# Altium PCB PCB1.PcbDoc
Units mm, origin at the board's own origin, x right, y up, seen from the top; angles counter-clockwise.
Board outline 100 x 61 mm, 4 copper layers (Top Layer, Mid Layer 1, Mid Layer 2, Bottom Layer), stack 0.97 mm thick; 101 components, 153 nets, 513 pads, 241 vias.
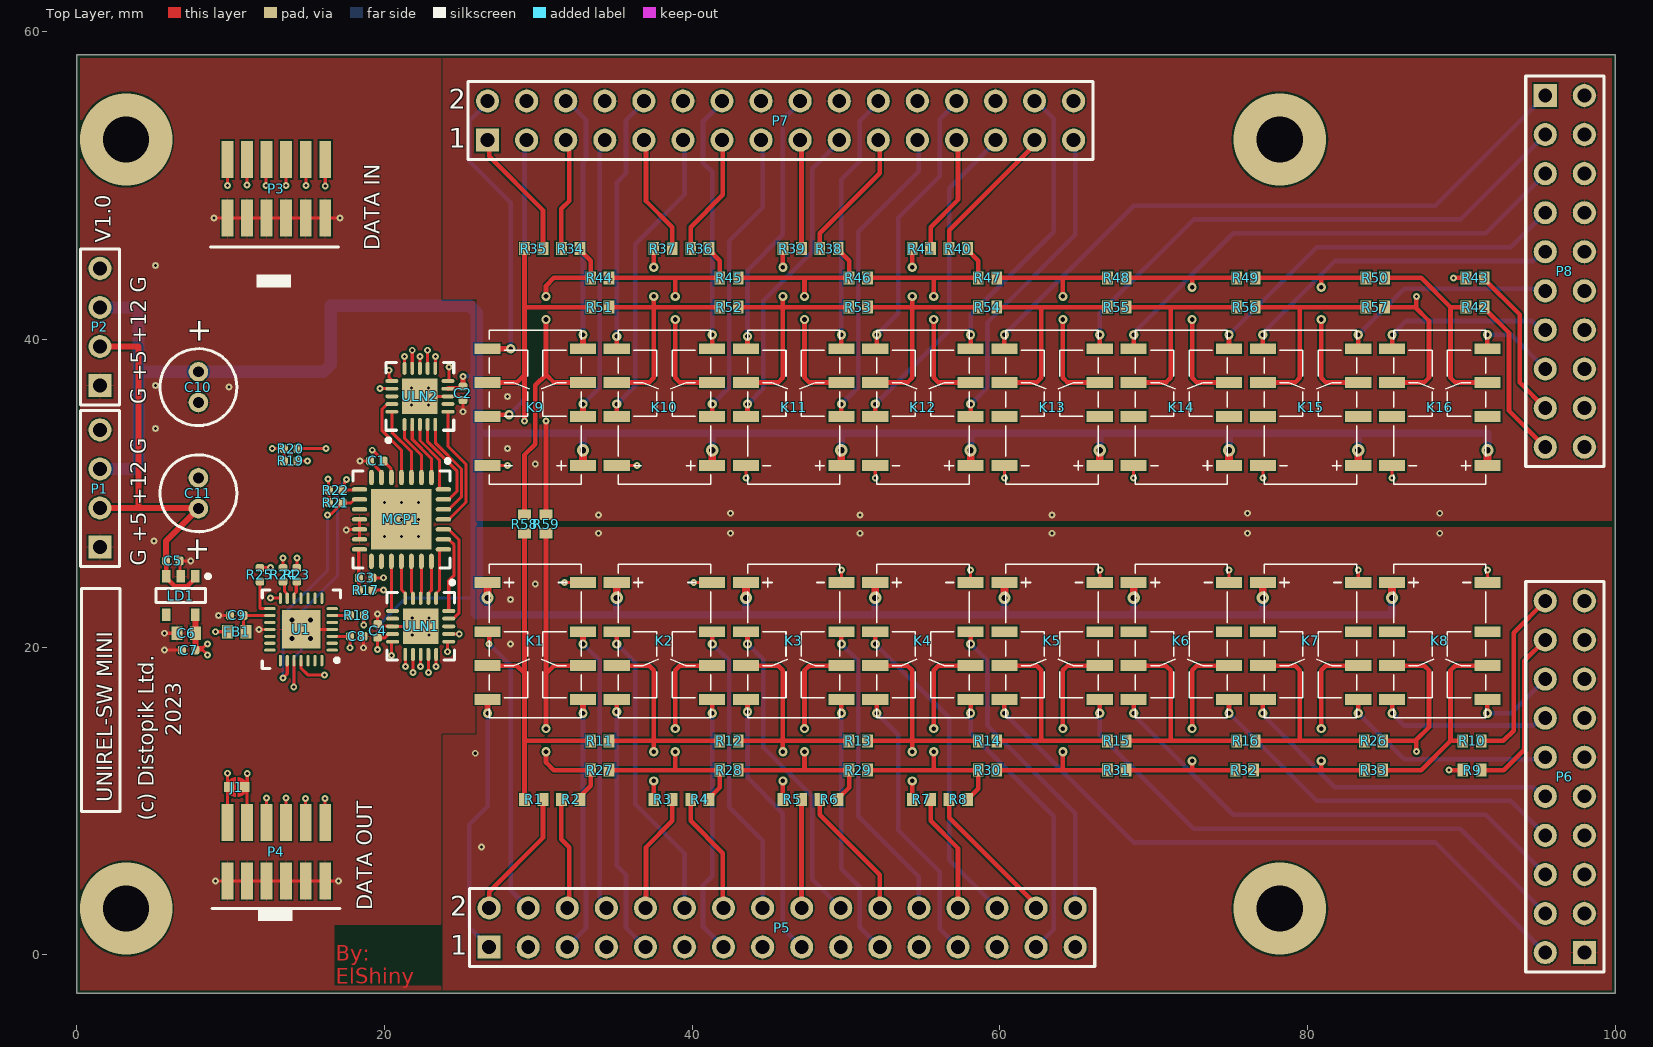
[diagram p0: Top Layer view]
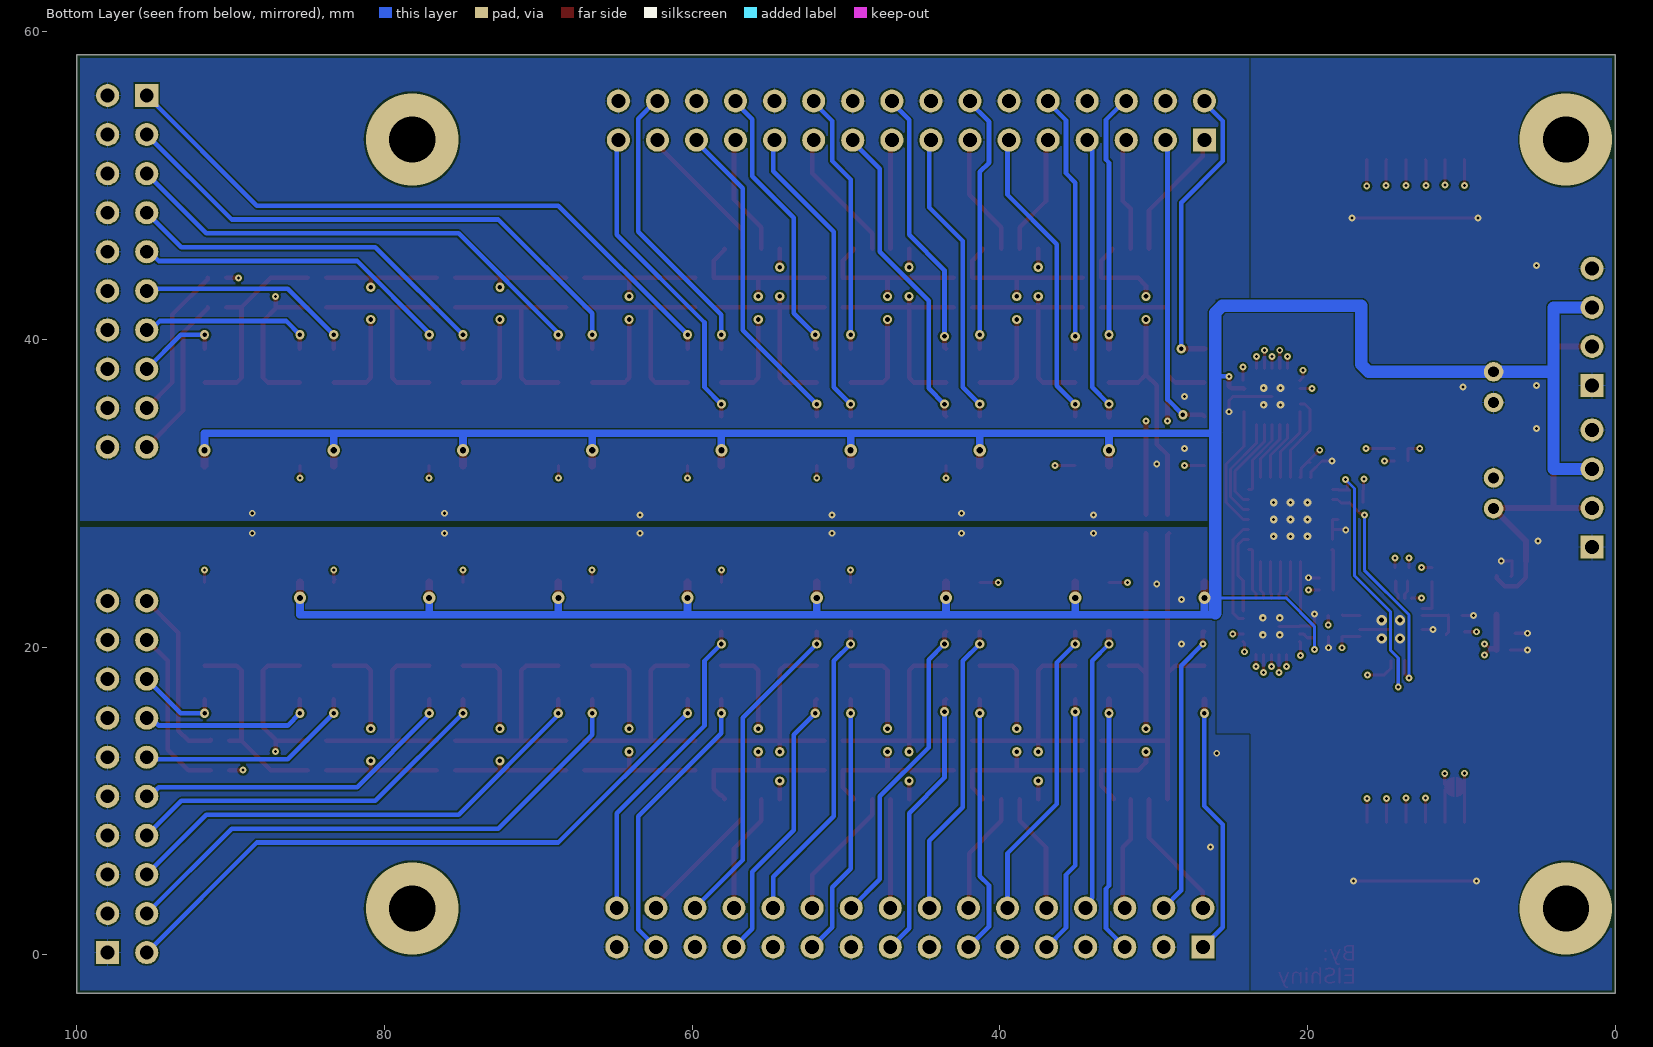
[diagram p1: Bottom Layer view, seen from below]
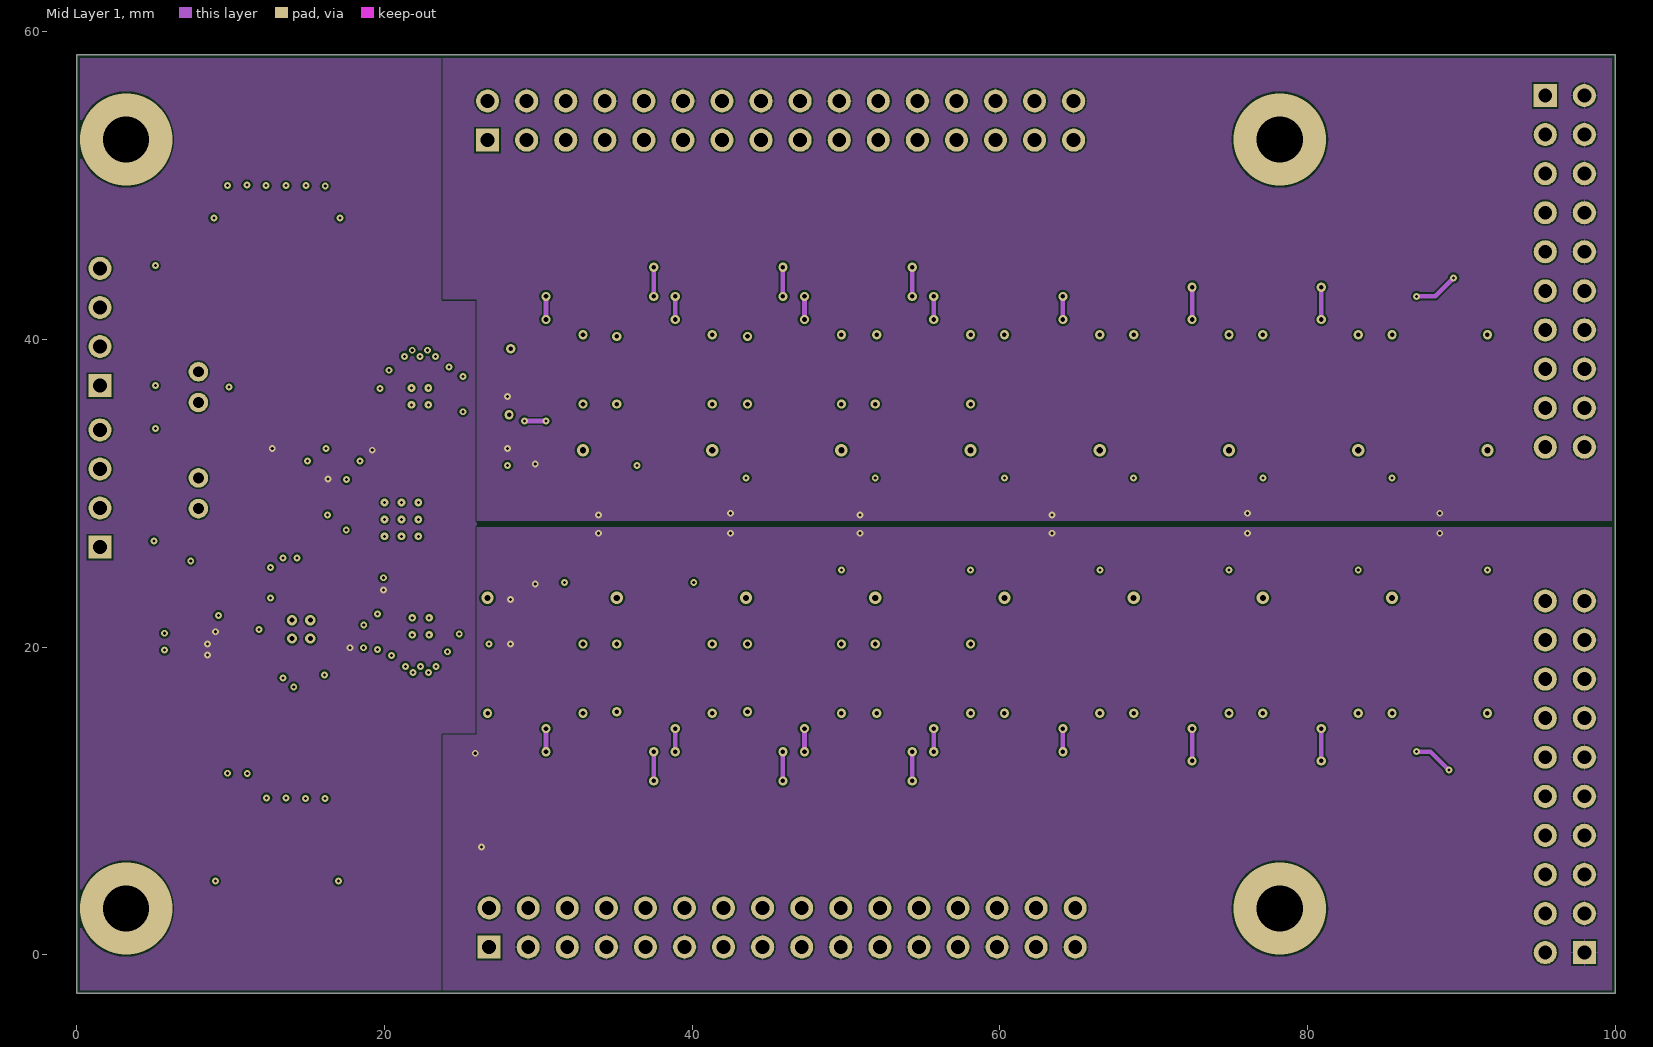
[diagram p2: Mid Layer 1]
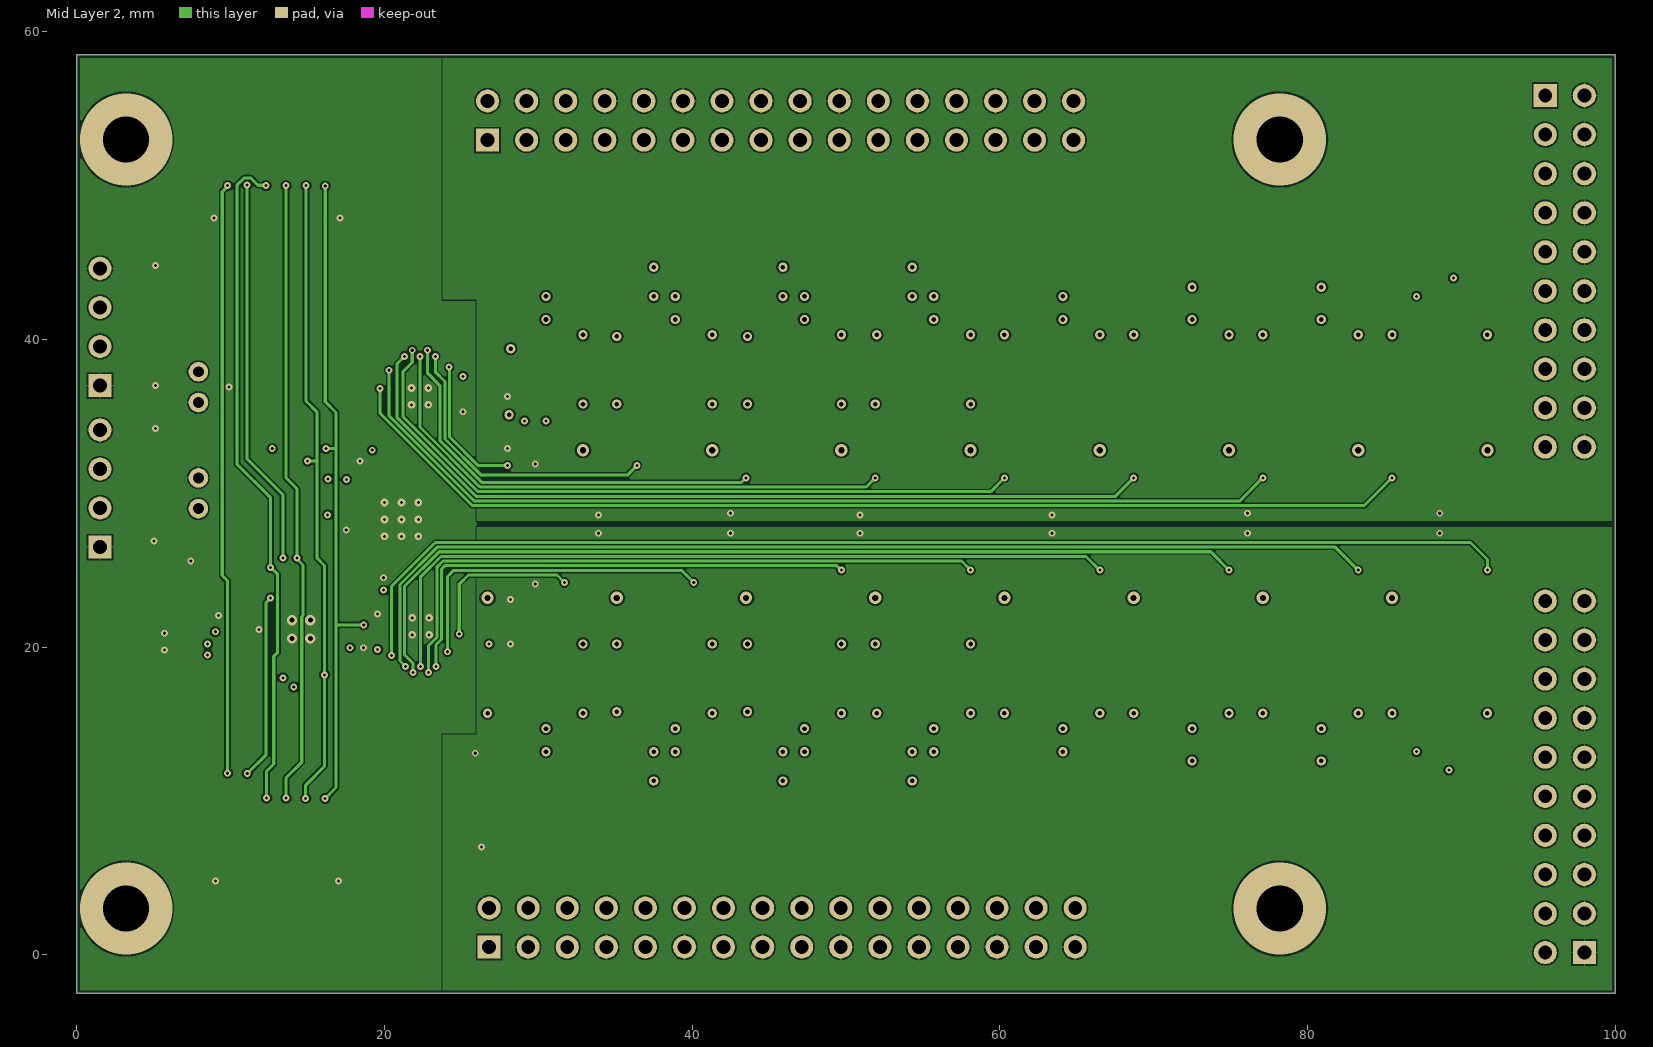
[diagram p3: Mid Layer 2]
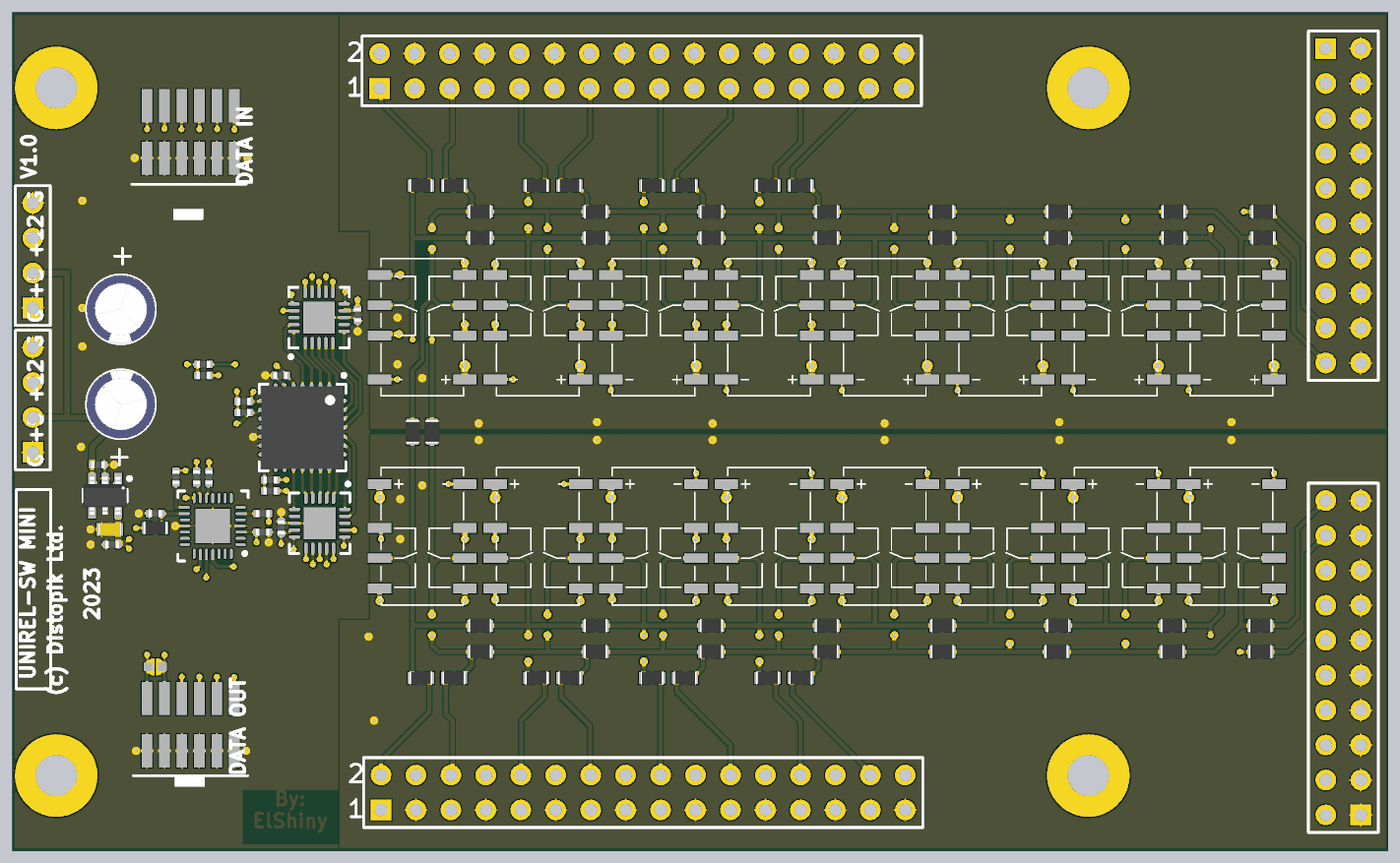
[diagram p4: 3D render of the assembled board from above, using the file's embedded part models]

## Layer stack, top to bottom
Top Solder: solder mask 0.0127, Solder Resist, Dk 3.8
Top Layer: signal copper 0.035
Dielectric 1: prepreg 0.1, 2313, Dk 4.05
Mid Layer 1: signal copper 0.0175
Core: core 0.665, FR-4, Dk 4.5
Mid Layer 2: signal copper 0.0175
Dielectric 2: prepreg 0.1, 2313, Dk 4.05
Bottom Layer: signal copper 0.035
Bottom Solder: solder mask 0.0127, Solder Resist, Dk 3.8

## Board outline
0,-2.5 0,58.5 100,58.5 100,-2.5

## Design rules (kind name [scope] priority, off if disabled: settings)
BoardOutlineClearance [All] p1: gap=0.2 ignorepadtopadclearanceinfootprint=FALSE
Clearance [All] p1: gap=0.102 ignorepadtopadclearanceinfootprint=FALSE except(0.127: Arc-Via Track-Via SMDPad-Via THPad-Via Via-Via Via-Fill Via-Poly Via-Region Via-Text; 0.25: Arc-Hole Track-Hole SMDPad-Hole THPad-Hole Via-Hole Fill-Hole Poly-Hole Region-Hole Text-Hole)
ComponentClearance [All] p1: gap=0.102 collisioncheckmode=3 verticalgap=0.102 showdistances=TRUE
DiffPairsRouting [All] p1: maxlimit=0.102 minlimit=0.102 mostfreqgap=0.102 toplayer_minwidth=0.102 toplayer_maxwidth=1816.048 toplayer_prefwidth=0.102 midlayer1_minwidth=0.102 midlayer1_maxwidth=1816.048 midlayer1_prefwidth=0.102 midlayer2_minwidth=0.102 midlayer2_maxwidth=1816.048 midlayer2_prefwidth=0.102 bottomlayer_minwidth=0.102 bottomlayer_maxwidth=1816.048 bottomlayer_prefwidth=0.102 maxuncoupledlength=12.7
Height [All] p1: minheight=0 maxheight=1816.048 prefheight=12.7
HoleSize [All] p1: absolutevalues=TRUE maxlimit=6.3 minlimit=0.2 maxpercent=80.000 minpercent=20.000
HoleToHoleClearance [All] p1: gap=0.25 allowstackedmicrovias=FALSE
MinimumAnnularRing [All] p1: minimumring=0.076
MinimumSolderMaskSliver [All] p1: minsoldermaskwidth=0
PlaneClearance [All] p1: clearance=0.102
PlaneConnect PlaneConnectPowerPads [InPadClass('PowerPads')] p1: planeconnectstyle=Direct reliefexpansion=0.508 reliefentries=4 reliefconductorwidth=0.254 reliefairgap=0.254
PlaneConnect [All] p2: pad.planeconnectstyle=Relief pad.reliefexpansion=0.3 pad.reliefentries=4 pad.reliefconductorwidth=0.102 pad.reliefairgap=0.102 via.planeconnectstyle=Direct via.reliefexpansion=0.3 via.reliefentries=4 via.reliefconductorwidth=0.127 via.reliefairgap=0.127
PolygonConnect PolygonConnectPowerPads [All vs (InPadClass('PowerPads'))] p1: connectstyle=Direct reliefconductorwidth=0.254 reliefentries=4 polygonreliefangle="90 Angle" airgapwidth=0.254
PolygonConnect [All] p2: thpad.connectstyle=Relief thpad.reliefconductorwidth=0.102 thpad.reliefentries=4 thpad.polygonreliefangle="90 Angle" thpad.airgapwidth=0.102 smdpad.connectstyle=Relief smdpad.reliefconductorwidth=0.102 smdpad.reliefentries=4 smdpad.polygonreliefangle="90 Angle" smdpad.airgapwidth=0.102 via.connectstyle=Direct via.reliefconductorwidth=0.127 via.reliefentries=4 via.polygonreliefangle="90 Angle" via.airgapwidth=0.127
RoutingVias [All] p1: holewidth=0.2 width=0.45 viastyle="Through Hole" minholewidth=0.2 minwidth=0.45 maxholewidth=6.3 maxwidth=6.55
SilkToSilkClearance [All] p1: silktosilkclearance=0
SilkToSolderMaskClearance [IsPad] p1: minsilkscreentomaskgap=0.102 clearancetoexposedcopper=TRUE
SolderMaskExpansion [All] p1: expansion=0.075 istentingtop=FALSE
Width [All] p1: maxlimit=1816.048 minlimit=0.102 preferedwidth=0.102
20 further rules are at their usual default settings.

## Components (designator, comment, footprint, x,y, rotation, side; value= is the part's Value field where it differs from the comment)
C1 "100n" R1005_0402i_L 19.5,32.1 r0 top
C2 "100n" R1005_0402i_L 25.1,36.5 r270 top
C3 "100n" R1005_0402i_L 18.765,24.5 r180 top
C4 "100n" R1005_0402i_L 19.55,21.05 r90 top
C5 "100n" R1005_0402i_L 6.24,25.6 r0 top
C6 "1u" C1608_0603I_L 7.1,20.9 r180 top
C7 "100n" R1005_0402i_L 7.26,19.8 r180 top
C8 "100n" R1005_0402i_L 18.2,20.7 r0 top
C9 "100n" R1005_0402i_L 10.4,22.055 r180 top
C10 "C+" "C AlElko 5x11 R2" 7.9,36.9 r90 top
C11 "C+" "C AlElko 5x11 R2" 7.9,30 r270 top
FB1 "FERITTE BEAD" R1608_0603I_L 10.4,21 r0 top
J1 "Terminator" solderJumper 10.4,10.9 r0 top
K1 "DPDT" "AXICOM IM-G Relay" 29.8,20.4 r270 top
K2 "DPDT" "AXICOM IM-G Relay" 38.2,20.4 r270 top
K3 "DPDT" "AXICOM IM-G Relay" 46.6,20.4 r270 top
K4 "DPDT" "AXICOM IM-G Relay" 55,20.4 r270 top
K5 "DPDT" "AXICOM IM-G Relay" 63.4,20.4 r270 top
K6 "DPDT" "AXICOM IM-G Relay" 71.8,20.4 r270 top
K7 "DPDT" "AXICOM IM-G Relay" 80.2,20.4 r270 top
K8 "DPDT" "AXICOM IM-G Relay" 88.6,20.4 r270 top
K9 "DPDT" "AXICOM IM-G Relay" 29.8,35.6 r90 top
K10 "DPDT" "AXICOM IM-G Relay" 38.2,35.6 r90 top
K11 "DPDT" "AXICOM IM-G Relay" 46.6,35.6 r90 top
K12 "DPDT" "AXICOM IM-G Relay" 55,35.6 r90 top
K13 "DPDT" "AXICOM IM-G Relay" 63.4,35.6 r90 top
K14 "DPDT" "AXICOM IM-G Relay" 71.8,35.6 r90 top
K15 "DPDT" "AXICOM IM-G Relay" 80.2,35.6 r90 top
K16 "DPDT" "AXICOM IM-G Relay" 88.6,35.6 r90 top
LD1 "NCP115 3.3V" TSOP95P280X110-6L 6.75,23.35 r270 top
MCP1 "MCP32017" "MCP23017 QFN" 21.1,28.3 r270 top
P1 "PWR" HDR1X4 1.5,26.5 r90 top
P2 "PWR" HDR1X4 1.5,37 r90 top
P3 "Input" "1.27mm SMD conn" 12.965,49.795 r180 top
P4 "Output" "1.27mm SMD conn" 12.965,6.705 r180 top
P5 "Header 16X2" HDR2X16 26.8,0.5 r0 top
P6 "Header 10X2" HDR2X10 98,0.14 r90 top
P7 "Header 16X2" HDR2X16 26.7,52.96 r0 top
P8 "Header 10X2" HDR2X10 95.46,55.86 r270 top
R1 "R" R1608_0603I_L 29.7,10.1 r0 top
R2 "R" R1608_0603I_L 32.1,10.1 r180 top
R3 "R" R1608_0603I_L 38.1,10.1 r0 top
R4 "R" R1608_0603I_L 40.5,10.1 r180 top
R5 "R" R1608_0603I_L 46.5,10.1 r0 top
R6 "R" R1608_0603I_L 48.9,10.1 r180 top
R7 "R" R1608_0603I_L 54.9,10.1 r0 top
R8 "R" R1608_0603I_L 57.3,10.1 r180 top
R9 "R" R1608_0603I_L 90.7,12 r0 top
R10 "R" R1608_0603I_L 90.7,13.9 r0 top
R11 "R" R1608_0603I_L 34,13.9 r0 top
R12 "R" R1608_0603I_L 42.4,13.9 r0 top
R13 "R" R1608_0603I_L 50.8,13.9 r0 top
R14 "R" R1608_0603I_L 59.2,13.9 r0 top
R15 "R" R1608_0603I_L 67.6,13.9 r0 top
R16 "R" R1608_0603I_L 76,13.9 r0 top
R17 "100k" R1005_0402i_L 18.765,23.7 r180 top
R18 "500" R1005_0402i_L 18.21,22.055 r180 top
R19 "100k" R1005_0402i_L 13.9,32.1 r0 top
R20 "100k" R1005_0402i_L 13.9,32.9 r0 top
R21 "10k" R1005_0402i_L 16.825,29.4 r0 top
R22 "10k" R1005_0402i_L 16.825,30.2 r0 top
R23 "500" R1005_0402i_L 14.3,24.7 r270 top
R24 "500" R1005_0402i_L 13.4,24.7 r270 top
R25 "500" R1005_0402i_L 11.9,24.7 r270 top
R26 "R" R1608_0603I_L 84.3,13.9 r0 top
R27 "R" R1608_0603I_L 34,12 r0 top
R28 "R" R1608_0603I_L 42.4,12 r0 top
R29 "R" R1608_0603I_L 50.8,12 r0 top
R30 "R" R1608_0603I_L 59.2,12 r0 top
R31 "R" R1608_0603I_L 67.6,12 r0 top
R32 "R" R1608_0603I_L 75.9,12 r0 top
R33 "R" R1608_0603I_L 84.3,12 r0 top
R34 "R" R1608_0603I_L 32.1,45.9 r180 top
R35 "R" R1608_0603I_L 29.7,45.9 r0 top
R36 "R" R1608_0603I_L 40.5,45.9 r180 top
R37 "R" R1608_0603I_L 38.1,45.9 r0 top
R38 "R" R1608_0603I_L 48.9,45.9 r180 top
R39 "R" R1608_0603I_L 46.5,45.9 r0 top
R40 "R" R1608_0603I_L 57.3,45.9 r180 top
R41 "R" R1608_0603I_L 54.9,45.9 r0 top
R42 "R" R1608_0603I_L 90.9,42.1 r0 top
R43 "R" R1608_0603I_L 90.9,44 r0 top
R44 "R" R1608_0603I_L 34,44 r0 top
R45 "R" R1608_0603I_L 42.4,44 r0 top
R46 "R" R1608_0603I_L 50.8,44 r0 top
R47 "R" R1608_0603I_L 59.2,44 r0 top
R48 "R" R1608_0603I_L 67.6,44 r0 top
R49 "R" R1608_0603I_L 76,44 r0 top
R50 "R" R1608_0603I_L 84.4,44 r0 top
R51 "R" R1608_0603I_L 34,42.1 r0 top
R52 "R" R1608_0603I_L 42.4,42.1 r0 top
R53 "R" R1608_0603I_L 50.8,42.1 r0 top
R54 "R" R1608_0603I_L 59.2,42.1 r0 top
R55 "R" R1608_0603I_L 67.6,42.1 r0 top
R56 "R" R1608_0603I_L 76,42.1 r0 top
R57 "R" R1608_0603I_L 84.4,42.1 r0 top
R58 "R" R1608_0603I_L 29.1,28 r270 top
R59 "R" R1608_0603I_L 30.5,28 r270 top
U1 "ATtiny88-MMU" 28M1_N 14.575,21.15 r180 top
ULN1 "ULN2803" QFN127P600-8N 22.35,21.35 r270 top
ULN2 "ULN2803" QFN127P600-8N 22.3,36.3 r90 top

## Footprints (in the part's own frame and the unit in brackets; to place one, negate y for a bottom-side part, rotate by r counter-clockwise, add the part's x,y. Pads: shape width x height; smd on the part's side, far side on the other; paste and mask are expansions set on the pad)
"1.27mm SMD conn" [mm]
  rect 0.76x2.4 smd: 1(3.175,1.905) 2(3.175,-1.905) 3(1.905,1.905) 4(1.905,-1.905) 5(0.635,1.905) 6(0.635,-1.905) 7(-0.635,1.905) 8(-0.635,-1.905) 9(-1.905,1.905) 10(-1.905,-1.905) 11(-3.175,1.905) 12(-3.175,-1.905)
28M1_N [mm]
  oval 0.75x0.2 smd: 1(-2.025,1.35) 2(-2.025,0.9) 3(-2.025,0.45) 4(-2.025,0) 5(-2.025,-0.45) 6(-2.025,-0.9) 7(-2.025,-1.35) 15(2.025,-1.35) 16(2.025,-0.9) 17(2.025,-0.45) 18(2.025,0) 19(2.025,0.45) 20(2.025,0.9) 21(2.025,1.35)
  oval 0.2x0.75 smd: 8(-1.35,-2.025) 9(-0.9,-2.025) 10(-0.45,-2.025) 11(0,-2.025) 12(0.45,-2.025) 13(0.9,-2.025) 14(1.35,-2.025) 22(1.35,2.025) 23(0.9,2.025) 24(0.45,2.025) 25(0,2.025) 26(-0.45,2.025) 27(-0.9,2.025) 28(-1.35,2.025)
  rect 2.5x2.5 smd: 29(0,0)
  silkscreen extent -2.45,1.88 -2.2,2.12, body extent -2.02,-2.02 2.02,2.02, height 1
"AXICOM IM-G Relay" [mm] "TE CONNECTIVITY AXICOM IM-G (Gull wings) Relay SMD"
  rect 0.7x1.7 smd: 1(-3.8,-3.1) 2(-0.6,-3.1) 3(1.6,-3.1) 4(3.8,-3.1) 5(3.8,3.1) 6(1.6,3.1) 7(-0.6,3.1) 8(-3.8,3.1)
  silkscreen extent -5,-3 5,3
C1608_0603I_L [mm] "Chip Capacitor, 2-Leads, Body 1.57x0.85mm, IPC High Density"
  rect 0.72x0.9 smd: 1(-0.6,0) 2(0.6,0)
  body extent -0.82,-0.48 0.82,0.48, height 0.95
"C AlElko 5x11 R2" [mm]
  round 1.27 hole 0.711: 1(1,0) 2(-1,0)
  silkscreen extent -2.5,-2.5 2.5,2.5, body extent -2.5,-2.5 2.5,2.5, height 11.01
HDR1X4 [mm] "Connector; Header; 4 Position"
  rect 1.5x1.5 hole 0.9: 1(0,0)
  round 1.5 hole 0.9: 2(2.54,0) 3(5.08,0) 4(7.62,0)
  silkscreen extent -1.27,-1.27 8.89,1.27
HDR2X10 [mm] "Connector; Header; 10x2 Position"
  rect 1.5x1.5 hole 0.9: 1(0,0)
  round 1.5 hole 0.9: 2(0,2.54) 3(2.54,0) 4(2.54,2.54) 5(5.08,0) 6(5.08,2.54) 7(7.62,0) 8(7.62,2.54) 9(10.16,0) 10(10.16,2.54) 11(12.7,0) 12(12.7,2.54) 13(15.24,0) 14(15.24,2.54) 15(17.78,0) 16(17.78,2.54) 17(20.32,0) 18(20.32,2.54) 19(22.86,0) 20(22.86,2.54)
  silkscreen extent -1.27,-1.27 24.13,3.81
HDR2X16 [mm] "Connector; Header; 16x2 Position"
  rect 1.5x1.5 hole 0.9: 1(0,0)
  round 1.5 hole 0.9: 2(0,2.54) 3(2.54,0) 4(2.54,2.54) 5(5.08,0) 6(5.08,2.54) 7(7.62,0) 8(7.62,2.54) 9(10.16,0) 10(10.16,2.54) 11(12.7,0) 12(12.7,2.54) 13(15.24,0) 14(15.24,2.54) 15(17.78,0) 16(17.78,2.54) 17(20.32,0) 18(20.32,2.54) 19(22.86,0) 20(22.86,2.54) 21(25.4,0) 22(25.4,2.54) 23(27.94,0) 24(27.94,2.54) 25(30.48,0) 26(30.48,2.54) 27(33.02,0) 28(33.02,2.54) 29(35.56,0) 30(35.56,2.54) 31(38.1,0) 32(38.1,2.54)
  silkscreen extent -1.27,-1.27 39.37,3.81
"MCP23017 QFN" [mm] "QFN, 28-Leads, Body 6,00x6,00mm, Pitch 0,65mm, Thermal Pad 3,93x3,93mm, IPC High Density"
  oval 1x0.3 smd: 1(-2.725,1.95) 2(-2.725,1.3) 3(-2.725,0.65) 4(-2.725,0) 5(-2.725,-0.65) 6(-2.725,-1.3) 7(-2.725,-1.95) 15(2.725,-1.95) 16(2.725,-1.3) 17(2.725,-0.65) 18(2.725,0) 19(2.725,0.65) 20(2.725,1.3) 21(2.725,1.95)
  oval 0.3x1 smd: 8(-1.95,-2.725) 9(-1.3,-2.725) 10(-0.65,-2.725) 11(0,-2.725) 12(0.65,-2.725) 13(1.3,-2.725) 14(1.95,-2.725) 22(1.95,2.725) 23(1.3,2.725) 24(0.65,2.725) 25(0,2.725) 26(-0.65,2.725) 27(-1.3,2.725) 28(-1.95,2.725)
  rect 3.93x3.93 smd: 29(0,0)
  silkscreen extent -3.92,-3.15 3.15,3.15, body extent -3,-3 3,3, height 0.9
QFN127P600-8N [mm]
  oval 0.85x0.25 smd: 1(-1.825,1) 2(-1.825,0.5) 3(-1.825,0) 4(-1.825,-0.5) 5(-1.825,-1) 11(1.825,-1) 12(1.825,-0.5) 13(1.825,0) 14(1.825,0.5) 15(1.825,1)
  oval 0.25x0.85 smd: 6(-1,-1.825) 7(-0.5,-1.825) 8(0,-1.825) 9(0.5,-1.825) 10(1,-1.825) 16(1,1.825) 17(0.5,1.825) 18(0,1.825) 19(-0.5,1.825) 20(-1,1.825)
  rect 2.3x2.3 smd: 21(0,0)
  silkscreen extent -2.97,-2.2 2.2,2.2, body extent -2.05,-2.05 2.05,2.05, height 0.8
R1005_0402i_L [mm] "Resistor, Chip; 1.00 mm L X 0.50 mm W X 0.40 mm H body"
  rrect50% 0.52x0.56 smd: 1(-0.44,0) 2(0.44,0)
  body extent -0.5,-0.25 0.5,0.25, height 0.4
R1608_0603I_L [mm] "Chip Resistor, 2-Leads, Body 1.57x0.85mm, IPC High Density"
  rect 0.7x0.85 smd: 1(-0.6,0) 2(0.6,0)
  body extent -0.82,-0.48 0.82,0.48, height 0.5
solderJumper [mil]
  rect 25x25 smd: 1(20,0) 2(-20,0)
  Top Layer region: 2.51,25 12.08,23.1 20.19,17.68 25.61,9.57 27.51,0 27.51,0 25.61,-9.57 20.19,-17.68 12.08,-23.1 2.51,-25 2.51,-25
  Top Layer region: -2.51,25 -12.08,23.1 -20.19,17.68 -25.61,9.57 -27.51,0 -27.51,0 -25.61,-9.57 -20.19,-17.68 -12.08,-23.1 -2.51,-25 -2.51,-25
TSOP95P280X110-6L [mm]
  rect 0.8x0.55 smd: 1(-1.25,0.95) 2(-1.25,0) 3(-1.25,-0.95) 4(1.25,-0.95) 5(1.25,0.95)
  silkscreen extent -1.37,-1.6 0.45,1.9, body extent -1.38,-1.6 1.38,1.6, height 1.1

## Part data
C1 C2 C3 C4 C5 C6 C7 C8 C9: library part C, "Capacitor"
C10 C11: "Capacitor Polarized"
J1: library part JMP_mini
K1 K2 K3 K4 K5 K6 K7 K8 K9 K10 K11 K12 K13 K14 K15 K16: library part "IM-GR Relay DPDT", "TE CONNECTIVITY  IM-GR  RELAY, DPDT, NO", Farnell ID=1175070, URL=http://si.farnell.com/te-connectivity-axicom/im06gr/relay-gull-wing-dpco-12vdc-2a/dp/1175070
P1 P2: library part "Header 4", "Header, 4-Pin", LatestRevisionDate=17-Jul-2002, LatestRevisionNote="Re-released for DXP Platform.", Publisher="Altium Limited"
P3 P4: library part "Header 6X2", "Header, 6-Pin, Dual row", LatestRevisionDate=17-Jul-2002, LatestRevisionNote="Re-released for DXP Platform.", Publisher="Altium Limited"
P5 P7: "Header, 16-Pin, Dual row", LatestRevisionDate=17-Jul-2002, LatestRevisionNote="Re-released for DXP Platform.", Publisher="Altium Limited"
P6 P8: "Header, 10-Pin, Dual row", LatestRevisionDate=17-Jul-2002, LatestRevisionNote="Re-released for DXP Platform.", Publisher="Altium Limited"
R17 R18 R19 R20 R21 R22 R23 R24 R25: library part R, "R"
U1: "8-bit AVR Microcontroller, 1.8-5.5V, 8KB Flash, 64 Bytes EEPROM, 512 Bytes SRAM, 28-pin MLF, Industrial Grade (-40°C to 85°C), Pb-Free", Supplier Part Number 1=ATTINY88-MMU-ND, ComponentLink1Description="Manufacturer Link", ComponentLink1URL=http://www.atmel.com/products/avr/default.asp?, ComponentLink2Description="ATtiny48/88 Datasheet", ComponentLink2URL=http://www.atmel.com/dyn/resources/prod_documents/doc8008.pdf, ComponentLink3Description="ATtiny48/88 Summary", ComponentLink3URL=http://www.atmel.com/dyn/resources/prod_documents/8008S.pdf, ComponentLink4Description="Atmel.com Home", ComponentLink4URL=http://www.atmel.com, DatasheetVersion="revC, Mar-2009", PackageDescription="28-pad, 4x4x1.0mm Body, Pitch 0.45mm, 2.4x2.4mm Exposed Pad, Plastic Very Thin QFN Package (VQFN)", PackageReference=28M1, PackageVersion="revB, Nov-2008", Published=1-Apr-2010, Publisher="Altium Limited", Supplier 1=Digi-Key, Supplier 2=Mouser, Supplier Part Number 2=556-ATTINY88-MMU

## Via types
v1: diameter 0.45, hole 0.2, Top Layer to Bottom Layer, 113 vias
v2: diameter 0.6, hole 0.3, Top Layer to Bottom Layer, 87 vias
v3: diameter 0.5, hole 0.2, Top Layer to Bottom Layer, 17 vias
v4: diameter 0.8, hole 0.4, Top Layer to Bottom Layer, 16 vias
v5: diameter 6, hole 3, Top Layer to Bottom Layer, 4 vias
v6: diameter 0.66, hole 0.33, Top Layer to Bottom Layer, 4 vias

## Nets (pads, with @x,y where several pads share a name; then routed paths per layer and width w, separated by ;. In a path a pad name is that pad's centre, name@x,y a point inside that pad or via, vN(x,y) a via of type N, cw(c..) or ccw(c..) an arc to the next point about the centre after c; other vN are vias at no path point)
+3.3V: C1.2 C6.1 C7.1 C8.1 FB1.1 LD1.5 MCP1.5 R17.1 R19.1 R20.1 R21.1 R22.1 U1.3 | length 13.2
  Top Layer w0.2: v1(8.5,19.5) 8.2,19.8 C7.1 7.7,19.804 7.858,19.961 8.194,19.961 8.432,20.2 v1(8.5,20.2) ; v1(9,21) FB1.1 ; v1(12.7,32.9) R20.1 R19.1 ; v1(16.325,30.94) 16.355,30.91 16.355,30.23 R22.1 R21.1 ; U1.3 C8.1 v1(17.76,19.96) ; v1(19.2,32.8) 19.24,32.8 C1.2 ; R17.1 v1(19.925,23.7) ; C1.2@19.844,32.004 C1.2 ; MCP1.5@20.469,31.044 MCP1.5 20.431,31.044 20.431,31.589 19.94,32.08 C1.2
  Top Layer w0.4: C7.1@7.7,19.804 LD1.5
+5: C5.1 C11.1 LD1.1 LD1.3 P1.2 P2.2 | length 27.3
  Top Layer w0.3: C5.1 LD1.3 5.8,24.519 6.371,23.948 7.173,23.948 7.7,24.475 LD1.1
  Top Layer w0.4: P1.2 4,29.04 ; P2.2 4,39.54 4,29.04 ; C5.1 5.8,26.9 C11.1 7.9,29.04 4,29.04
+12: C2.1 C4.1 C10.1 K1.1 K2.1 K3.1 K4.1 K5.1 K6.1 K7.1 K8.1 K9.1 K10.1 K11.1 K12.1 K13.1 K14.1 K15.1 K16.1 P1.3 P2.3 ULN1.9 ULN2.9 | length 239.5
  Top Layer w0.2: v1(19.55,19.85) C4.1 20.023,20.61 20.215,20.802 20.215,20.827 20.239,20.85 ULN1.9
  Top Layer w0.3: ULN2.9 24.15,36.825 24.965,36.825 25.08,36.94 C2.1 v1(25.1,37.6)
  Top Layer w0.5: v4(26.7,23.2) K1.1 ; K9.1 v4(32.9,32.8) ; v4(35.1,23.2) K2.1 ; K10.1 v4(41.3,32.8) ; v4(43.5,23.2) K3.1 ; K11.1 v4(49.7,32.8) ; v4(51.9,23.2) K4.1 ; K12.1 v4(58.1,32.8) ; v4(60.3,23.2) K5.1 ; K13.1 v4(66.5,32.8) ; v4(68.7,23.2) K6.1 ; K14.1 v4(74.9,32.8) ; v4(77.1,23.2) K7.1 ; K15.1 v4(83.3,32.8) ; v4(85.5,23.2) K8.1 ; K16.1 v4(91.7,32.8)
  Bottom Layer w0.2: v1(19.55,19.85) 19.55,21.35 21.4,23.2 26,23.2 v4(26.7,23.2)
  Bottom Layer w0.3: v1(25.1,37.6) 25.784,37.6 26,37.816
  Bottom Layer w0.5: 26,22.2 26.1,22.1 26.7,22.1 ; 26,34 26,33.9 32.9,33.9 ; v4(26.7,23.2) 26.7,22.1 ; v4(32.9,32.8) 32.9,33.9 ; v4(35.1,23.2) 35.1,22.1 ; v4(43.5,23.2) 43.5,22.1 ; v4(51.9,23.2) 51.9,22.1 ; v4(60.3,23.2) 60.3,22.1 ; v4(68.7,23.2) 68.7,22.1 ; v4(77.1,23.2) 77.1,22.1 ; v4(83.3,32.8) 83.3,33.9 ; v4(85.5,23.2) 85.5,22.1 77.1,22.1 ; v4(91.7,32.8) 91.7,33.9 83.3,33.9 ; 26.7,22.1 35.1,22.1 ; 32.9,33.9 41.3,33.9 ; 35.1,22.1 43.5,22.1 ; 41.3,33.9 v4(41.3,32.8) 41.3,33.9 ; 41.3,33.9 49.7,33.9 ; 43.5,22.1 51.9,22.1 ; 49.7,33.9 v4(49.7,32.8) 49.7,33.9 ; 49.7,33.9 58.1,33.9 ; 51.9,22.1 60.3,22.1 ; 58.1,33.9 v4(58.1,32.8) 58.1,33.9 ; 58.1,33.9 66.5,33.9 ; 60.3,22.1 68.7,22.1 ; 66.5,33.9 v4(66.5,32.8) 66.5,33.9 ; 66.5,33.9 74.9,33.9 ; 68.7,22.1 77.1,22.1 ; 74.9,33.9 v4(74.9,32.8) 74.9,33.9 ; 74.9,33.9 83.3,33.9
  Bottom Layer w0.8: P1.3 4,31.58 4,37.9 ; P2.3 4,42.08 4,37.9 ; 26,22.2 26,23.2 26,33.9 ; 26,34 26,37.816 26,41.731 25.531,42.2 16.5,42.2 16.5,38.369 16.031,37.9 C10.1 4,37.9
A1: K1.3 R1.1 R11.1 R58.2 | length 24.2
  Top Layer w0.3: K1.3 28.6,18.8 29.1,18.3 ; R58.2@29,27.4 29.1,27.3 29.1,18.3 ; R1.1 29.1,13.9 ; R11.1 29.1,13.9 ; 29.1,13.9 29.1,15.3 29.1,18.3
A2: K9.3 R34.1 R44.1 R58.1 | length 23.4
  Top Layer w0.3: R58.1 29.1,32.5 29.8,33.2 29.8,37.017 30.5,37.717 ; v2(30.5,41.3) 30.5,37.717 ; v2(30.5,42.8) 30.5,43.5 31,44 R44.1 33.4,45.125 32.7,45.825 R34.1 ; K9.3 31.017,37.2 30.5,37.717
  Mid Layer 1 w0.3: v2(30.5,41.3) v2(30.5,42.8)
Ac11: K1.2 P5.4 | length 19.1
  Top Layer w0.3: K1.2 26.8,21 v1(26.8,20.2)
  Bottom Layer w0.3: v1(26.8,20.2) 28.2,18.8 28.2,4.18 P5.4
Ac12: K2.2 P5.12 | length 19.8
  Top Layer w0.3: v2(35.1,20.2) K2.2
  Bottom Layer w0.3: v2(35.1,20.2) 36.3,19 36.3,9.8 39.5,6.6 P5.12
Ac13: K3.2 P5.20 | length 20.5
  Top Layer w0.3: K3.2 43.6,20.9 v2(43.6,20.2)
  Bottom Layer w0.3: v2(43.6,20.2) 44.629,19.171 44.629,13.471 47.8,10.3 47.8,4.9 P5.20
Ac14: K4.2 P5.28 | length 21.2
  Top Layer w0.3: v2(51.9,20.2) K4.2
  Bottom Layer w0.3: v2(51.9,20.2) 56.7,15.4 56.7,6.16 P5.28
Ac21: K9.2 P7.7 | length 18.6
  Top Layer w0.381: K9.2 v2(32.9,35.8)
  Bottom Layer w0.3: v2(32.9,35.8) 34,36.9 34,52.3 34.42,52.72 P7.7@34.42,52.96
Ac22: K10.2 P7.15 | length 19.3
  Top Layer w0.3: K10.2 v2(41.3,35.8)
  Bottom Layer w0.3: v2(41.3,35.8) 42.4,36.9 42.4,46.4 44.58,48.58 P7.15@44.58,52.96
Ac23: K11.2 P7.23 | length 20
  Top Layer w0.3: K11.2 v2(49.7,35.8)
  Bottom Layer w0.3: v2(49.7,35.8) 50.8,36.9 50.8,47 54.74,50.94 P7.23@54.74,52.96
Ac24: K12.2 P7.31 | length 20.8
  Top Layer w0.3: K12.2 v2(58.1,35.8)
  Bottom Layer w0.3: v2(58.1,35.8) 59.2,36.9 59.2,41.1 64.9,46.8 P7.31@64.9,52.96
Ad11: K1.4 P5.1 | length 17.1
  Top Layer w0.381: v2(26.7,15.7) K1.4
  Bottom Layer w0.3: v2(26.7,15.7) 26.7,9.67 25.5,8.47 25.5,1.8 P5.1
Ad12: K2.4 P5.9 | length 16.9
  Top Layer w0.3: v2(35.1,15.8) K2.4
  Bottom Layer w0.3: v2(35.1,15.8) 35.1,5.8 35.7,5.2 35.7,1.76 P5.9
Ad13: K3.4 P5.17 | length 17.6
  Top Layer w0.3: K3.4 43.6,16.5 v2(43.6,15.8)
  Bottom Layer w0.3: v2(43.6,15.8) 43.6,11.5 45.9,9.2 45.9,1.72 P5.17
Ad14: K4.4 P5.25 | length 18.3
  Top Layer w0.3: K4.4 52,16.5 v2(52,15.7)
  Bottom Layer w0.3: v2(52,15.7) 53.4,14.3 53.4,8.1 56.1,5.4 56.1,1.68 P5.25
Ad15: K5.4 P6.2 | length 42.5
  Top Layer w0.3: v2(60.3,15.7) K5.4
  Bottom Layer w0.3: v2(60.3,15.7) 68.7,7.3 88.3,7.3 P6.2
Ad16: K6.4 P6.6 | length 32.1
  Top Layer w0.3: v2(68.7,15.7) K6.4
  Bottom Layer w0.3: v2(68.7,15.7) 68.757,15.643 68.757,15.527 75.184,9.1 91.58,9.1 P6.6
Ad17: K7.4 P6.10 | length 21.6
  Top Layer w0.3: v2(77.1,15.7) K7.4
  Bottom Layer w0.3: v2(77.1,15.7) 77.157,15.643 77.157,15.527 81.784,10.9 94.684,10.9 95.284,10.3 P6.10
Ad18: K8.4 P6.14 | length 11.4
  Top Layer w0.3: v2(85.5,15.7) K8.4
  Bottom Layer w0.3: v2(85.5,15.7) 86.3,14.9 94.684,14.9 95.164,15.38 P6.14
Ad21: K9.4 P7.6 | length 16.7
  Top Layer w0.381: K9.4 v2(32.9,40.3)
  Bottom Layer w0.3: P7.6@31.88,55.5 33.1,54.28 33.1,51.7 32.9,51.5 v2(32.9,40.3)
Ad22: K10.4 P7.14 | length 16.9
  Top Layer w0.3: K10.4 v2(41.3,40.3)
  Bottom Layer w0.3: v2(41.3,40.3) 41.3,50.9 40.7,51.5 40.7,54.16 P7.14@42.04,55.5
Ad23: K11.4 P7.22 | length 17.1
  Top Layer w0.3: K11.4 v2(49.7,40.3)
  Bottom Layer w0.3: v2(49.7,40.3) 49.7,50.4 50.9,51.6 50.9,54.2 P7.22@52.2,55.5
Ad24: K12.4 P7.30 | length 18.8
  Top Layer w0.3: K12.4 v2(58.1,40.3)
  Bottom Layer w0.3: v2(58.1,40.3) 58.1,41.6 63.5,47 63.5,54.36 P7.30@62.36,55.5
Ad25: K13.4 P8.3 | length 36.1
  Top Layer w0.3: K13.4 v2(66.5,40.3)
  Bottom Layer w0.3: v2(66.5,40.3) 66.5,41.7 72.6,47.8 89.94,47.8 P8.3
Ad26: K14.4 P8.7 | length 24.7
  Top Layer w0.3: K14.4 v2(74.9,40.3)
  Bottom Layer w0.3: v2(74.9,40.3) 80.6,46 93.22,46 P8.7
Ad27: K15.4 P8.11 | length 14.4
  Top Layer w0.3: K15.4 v2(83.3,40.3)
  Bottom Layer w0.3: v2(83.3,40.3) 86.302,43.302 95.318,43.302 P8.11
Ad28: K16.4 P8.15 | length 5.6
  Top Layer w0.3: K16.4 v2(91.7,40.3)
  Bottom Layer w0.3: v2(91.7,40.3) 93.24,40.3 P8.15
AGND1: P5.3 P5.7 P5.11 P5.15 P5.19 P5.23 P5.27 P5.31 P6.1 P6.3 P6.5 P6.7 P6.9 P6.11 P6.13 P6.15 P6.17 P6.19
  other v1: 26.3,7 25.9,13.1 28.2,20.2 28.2,23.1 29.8,24.1 33.9,27.4 42.5,27.4 50.9,27.4 63.4,27.4 76.1,27.4 88.6,27.4
AGND2: P7.4 P7.8 P7.12 P7.16 P7.20 P7.24 P7.28 P7.32 P8.2 P8.4 P8.6 P8.8 P8.10 P8.12 P8.14 P8.16 P8.18 P8.20
  other v1: 33.9,28.6 50.9,28.6 63.4,28.6 42.5,28.7 76.1,28.7 88.6,28.7 29.8,31.9 28,32.9 28,36.3
As11: P5.2 R1.2 | length 8.5
  Top Layer w0.3: P5.2 26.8,4.1 30.3,7.6 R1.2
As12: P5.10 R3.2 | length 7.8
  Top Layer w0.3: P5.10 37,3.08 37,7 38.7,8.7 R3.2
As13: P5.18 R5.2 | length 7.1
  Top Layer w0.3: R5.2 47.11,10.09 47.11,3.05 P5.18
As14: P5.26 R7.2 | length 7.8
  Top Layer w0.3: R7.2 55.5,8.7 57.28,6.92 P5.26
As18: P6.18 R9.2 | length 11
  Top Layer w0.3: R9.2 92.762,12 94.1,13.337 94.1,19.1 P6.18
As21: P7.5 R34.2 | length 7.3
  Top Layer w0.3: R34.2 31.5,48.5 32,49 32,52.84 P7.5@31.88,52.96
As22: P7.13 R36.2 | length 7.9
  Top Layer w0.3: R36.2 39.9,47.3 42,49.4 42,52.92 P7.13@42.04,52.96
As23: P7.21 R38.2 | length 8.7
  Top Layer w0.3: R38.2 48.3,46.9 52.2,50.8 P7.21@52.2,52.96
As24: P7.29 R40.2 | length 9.4
  Top Layer w0.3: R40.2 56.7,47.1 62.36,52.76 P7.29@62.36,52.96
As28: P8.19 R42.2 | length 10.7
  Top Layer w0.3: R42.2 91.5,42.025 93.1,40.425 93.1,35.36 P8.19
AVCC: C9.1 FB1.2 U1.16 | length 3
  Top Layer w0.2: C9.1@10.84,22 10.84,20.96 FB1.2@11,20.8 ; C9.1@10.84,22.1 10.89,22.05 U1.16
B1: K1.6 R2.1 R27.1 R59.2 | length 22.9
  Top Layer w0.3: v2(30.5,13.2) 30.5,12.5 31,12 R27.1 33.4,10.975 32.6,10.175 R2.1@32.6,10.1 ; v2(30.5,14.7) 30.5,18.283 ; R59.2 30.5,18.283 ; K1.6 31.017,18.8 30.5,18.283
  Mid Layer 1 w0.3: v2(30.5,13.2) v2(30.5,14.7)
B2: K9.6 R35.1 R51.1 R59.1 | length 25.6
  Top Layer w0.3: K9.6 28.6,37.2 29.1,37.7 ; v1(29.1,34.7) 29.1,37.7 ; R35.1 29.1,42.1 ; R59.1 v1(30.5,34.7) ; R51.1 29.1,42.1 ; 29.1,37.7 29.1,40.7 29.1,42.1
  Mid Layer 1 w0.3: v1(29.1,34.7) v1(30.5,34.7)
Bc11: K1.7 P5.8 | length 18.6
  Top Layer w0.381: v2(32.9,20.2) K1.7
  Bottom Layer w0.3: v2(32.9,20.2) 34,19.1 34,3.7 34.42,3.28 P5.8
Bc12: K2.7 P5.16 | length 19.3
  Top Layer w0.3: v2(41.3,20.2) K2.7
  Bottom Layer w0.3: v2(41.3,20.2) 42.4,19.1 42.4,9.6 44.58,7.42 P5.16
Bc13: K3.7 P5.24 | length 20
  Top Layer w0.3: v2(49.7,20.2) K3.7
  Bottom Layer w0.3: v2(49.7,20.2) 50.8,19.1 50.8,9 54.74,5.06 P5.24
Bc14: K4.7 P5.32 | length 20.8
  Top Layer w0.3: v2(58.1,20.2) K4.7
  Bottom Layer w0.3: v2(58.1,20.2) 59.2,19.1 59.2,14.9 64.9,9.2 P5.32
Bc21: K9.7 P7.3 | length 19.7
  Top Layer w0.3: K9.7 26.8,35.1 v2(28.1,35.1)
  Bottom Layer w0.3: v2(28.1,35.1) 29.1,36.1 29.1,52.72 P7.3@29.29,52.91
Bc22: K10.7 P7.11 | length 19.8
  Top Layer w0.3: K10.7 v2(35.1,35.8)
  Bottom Layer w0.3: v2(35.1,35.8) 36.3,37 36.3,46.2 39.5,49.4 P7.11@39.5,52.96
Bc23: K11.7 P7.19 | length 20.5
  Top Layer w0.3: K11.7 43.6,35.1 v2(43.6,35.8)
  Bottom Layer w0.3: v2(43.6,35.8) 44.629,36.829 44.629,42.529 47.8,45.7 47.8,51.1 P7.19@49.66,52.96
Bc24: K12.7 P7.27 | length 21.2
  Top Layer w0.3: K12.7 v2(51.9,35.8)
  Bottom Layer w0.3: v2(51.9,35.8) 56.7,40.6 56.7,49.84 P7.27@59.82,52.96
Bd11: K1.5 P5.5 | length 16.7
  Top Layer w0.381: v2(32.9,15.7) K1.5
  Bottom Layer w0.3: P5.5 33.1,1.72 33.1,4.3 32.9,4.5 v2(32.9,15.7)
Bd12: K2.5 P5.13 | length 16.9
  Top Layer w0.3: v2(41.3,15.7) K2.5
  Bottom Layer w0.3: v2(41.3,15.7) 41.3,5.1 40.7,4.5 40.7,1.84 P5.13
Bd13: K3.5 P5.21 | length 17.1
  Top Layer w0.3: v2(49.7,15.7) K3.5
  Bottom Layer w0.3: v2(49.7,15.7) 49.7,5.6 50.9,4.4 50.9,1.8 P5.21
Bd14: K4.5 P5.29 | length 18.8
  Top Layer w0.3: v2(58.1,15.7) K4.5
  Bottom Layer w0.3: v2(58.1,15.7) 58.1,14.4 63.5,9 63.5,1.64 P5.29
Bd15: K5.5 P6.4 | length 36.1
  Top Layer w0.3: v2(66.5,15.7) K5.5
  Bottom Layer w0.3: v2(66.5,15.7) 66.5,14.3 72.6,8.2 89.94,8.2 P6.4
Bd16: K6.5 P6.8 | length 24.7
  Top Layer w0.3: v2(74.9,15.7) K6.5
  Bottom Layer w0.3: v2(74.9,15.7) 80.6,10 93.22,10 P6.8
Bd17: K7.5 P6.12 | length 14.4
  Top Layer w0.3: v2(83.3,15.7) K7.5
  Bottom Layer w0.3: v2(83.3,15.7) 86.302,12.698 95.318,12.698 P6.12
Bd18: K8.5 P6.16 | length 5.6
  Top Layer w0.3: v2(91.7,15.7) K8.5
  Bottom Layer w0.3: v2(91.7,15.7) 93.24,15.7 P6.16
Bd21: K9.5 P7.2 | length 19.3
  Top Layer w0.381: K9.5 v2(28.2,39.4)
  Bottom Layer w0.3: P7.2@26.8,55.5 25.5,54.2 25.5,51.6 28.2,48.9 v2(28.2,39.4)
Bd22: K10.5 P7.10 | length 16.9
  Top Layer w0.3: K10.5 v2(35.1,40.2)
  Bottom Layer w0.3: v2(35.1,40.2) 35.1,50.2 35.7,50.8 35.7,54.24 P7.10@36.96,55.5
Bd23: K11.5 P7.18 | length 17.6
  Top Layer w0.3: K11.5 43.6,39.5 v2(43.6,40.2)
  Bottom Layer w0.3: v2(43.6,40.2) 43.6,44.5 45.9,46.8 45.9,54.28 P7.18@47.12,55.5
Bd24: K12.5 P7.26 | length 18.3
  Top Layer w0.3: K12.5 52,39.5 v2(52,40.3)
  Bottom Layer w0.3: v2(52,40.3) 53.4,41.7 53.4,47.9 56.1,50.6 56.1,54.32 P7.26@57.28,55.5
Bd25: K13.5 P8.1 | length 42.5
  Top Layer w0.3: K13.5 v2(60.3,40.3)
  Bottom Layer w0.3: v2(60.3,40.3) 68.7,48.7 88.3,48.7 P8.1
Bd26: K14.5 P8.5 | length 32.1
  Top Layer w0.3: K14.5 v2(68.7,40.3)
  Bottom Layer w0.3: v2(68.7,40.3) 68.757,40.357 68.757,40.473 75.184,46.9 91.58,46.9 P8.5
Bd27: K15.5 P8.9 | length 21.6
  Top Layer w0.3: K15.5 v2(77.1,40.3)
  Bottom Layer w0.3: v2(77.1,40.3) 77.157,40.357 77.157,40.473 81.784,45.1 94.684,45.1 95.284,45.7 P8.9
Bd28: K16.5 P8.13 | length 11.5
  Top Layer w0.3: K16.5 v2(85.5,40.3)
  Bottom Layer w0.3: v2(85.5,40.3) 86.4,41.2 94.6,41.2 95.18,40.62 P8.13
Bs11: P5.6 R2.2 | length 7.3
  Top Layer w0.3: R2.2 31.5,7.5 32,7 32,3.16 P5.6
Bs12: P5.14 R4.2 | length 7.9
  Top Layer w0.3: R4.2 39.9,8.7 42,6.6 42,3.08 P5.14
Bs13: P5.22 R6.2 | length 8.7
  Top Layer w0.3: R6.2 48.3,9.1 52.2,5.2 P5.22
Bs14: P5.30 R8.2 | length 9.4
  Top Layer w0.3: R8.2 56.7,8.9 62.36,3.24 P5.30
Bs18: P6.20 R10.2 | length 11.8
  Top Layer w0.3: R10.2@91.3,13.975 R10.2 ; R10.2@91.33,13.93 R10.2 ; P6.20 93.4,20.94 93.4,14.575 92.725,13.9 R10.2
Bs21: P7.1 R35.2 | length 8.5
  Top Layer w0.3: P7.1@26.8,52.96 26.8,51.9 30.3,48.4 R35.2
Bs22: P7.9 R37.2 | length 7.8
  Top Layer w0.3: P7.9@36.96,52.96 37,52.92 37,49 38.7,47.3 R37.2
Bs23: P7.17 R39.2 | length 7.1
  Top Layer w0.3: R39.2 47.11,45.91 47.11,52.95 P7.17@47.12,52.96
Bs24: P7.25 R41.2 | length 7.8
  Top Layer w0.3: R41.2 55.5,47.3 57.28,49.08 P7.25@57.28,52.96
Bs28: P8.17 R43.2 | length 10.1
  Top Layer w0.3: R43.2 91.5,43.925 93.8,41.625 93.8,37.2 P8.17
GND: C1.1 C2.2 C3.1 C4.2 C5.2 C6.2 C7.2 C8.2 C9.2 C10.2 C11.2 LD1.2 MCP1.6 MCP1.11 MCP1.12 MCP1.13 MCP1.29 P1.1 P1.4 P2.1 P2.4 P3.1 P3.3 P3.5 P3.7 P3.9 P3.11 P4.1 P4.3 P4.5 P4.7 P4.9 P4.11 U1.4 U1.18 U1.29 ULN1.8 ULN1.21 ULN2.8 ULN2.21 | length 41.3
  Top Layer w0.2: v1(5.7,19.8) C7.2 ; v1(5.7,20.9) C6.2 ; LD1.2 6.715,24.635 6.715,25.565 C5.2 v1(7.4,25.6) ; v1(8.9,47.9) 9.78,47.9 P3.1 P3.5 ; v1(9,4.8) P4.1 P4.3 P4.11 v1(17,4.8) ; v1(9.2,22.055) C9.2 ; P3.3 P3.5 ; v1(11.85,21.15) U1.18 ; P3.7 P3.11 ; U1.29 U1.4 ; P3.9 P3.11 ; v1(17.1,47.9) 16.15,47.9 P3.11 ; v1(17.509,27.626) 17.521,27.638 18.363,27.638 MCP1.12 ; MCP1.11@18.025,28.3 MCP1.11 MCP1.12 ; MCP1.13 MCP1.12 ; v1(18.4,32.1) C1.1 ; v1(18.64,19.96) C8.2 ; C1.1@19.156,32.004 C1.1 ; C3.1 19.208,24.503 19.92,24.503 v1(19.924,24.507) ; v1(19.55,22.15) C4.2 19.68,21.36 20.515,21.36 ULN1.8 ULN1.21@21.85,21.35 ; MCP1.6 19.781,31.044 19.781,31.375 19.06,32.096 C1.1 ; ULN2.21 ULN2.8 24.824,36.3 25.068,36.055 C2.2@25.105,36.055 ; v1(25.1,35.3) 25.105,35.305 C2.2@25.105,36.055 ; C2.2 C2.2@25.105,36.055 ; P3.5 P3.11
  other v1: 5,26.9 5.1,34.2 9.9,36.9 5.1,37 5.1,44.8
  other v3: 21.8,20.8 22.9,20.8 21.8,21.9 22.9,21.9 20,27.2 21.1,27.2 22.2,27.2 20,28.3 21.1,28.3 22.2,28.3 20,29.4 21.1,29.4 22.2,29.4 21.75,35.75 22.85,35.75 21.75,36.85 22.85,36.85
  other v6: 13.975,20.55 15.175,20.55 13.975,21.75 15.175,21.75
INT: P3.12 P4.12 R18.1 R20.2 | length 48.6
  Top Layer w0.2: R20.2 v1(16.2,32.9) ; P4.12 v1(16.14,10.16) ; P3.12 16.148,51.692 v1(16.148,49.969) ; v1(18.65,21.45) R18.1
  Mid Layer 2 w0.2: v1(16.14,10.16) 16.848,10.868 16.848,21.5 ; v1(16.148,49.969) 16.148,35.952 16.848,35.252 16.848,32.9 ; v1(16.2,32.9) 16.848,32.9 ; v1(18.65,21.45) 16.898,21.45 16.848,21.5 ; 16.848,21.5 16.848,32.9
MISO: J1.2 P3.2 P4.2 | length 43.5
  Top Layer w0.2: P4.2 9.79,10.798 J1.2 9.8,10.992 v1(9.8,11.8) ; P3.2 9.8,51.69 v1(9.8,50)
  Mid Layer 2 w0.2: v1(9.8,11.8) 9.8,24.301 9.448,24.653 9.448,49.61 9.8,49.962 v1(9.8,50)
MISO_T88: J1.1 P4.4 U1.14 | length 16
  Top Layer w0.2: P4.4 11.06,10.748 J1.1 11.075,11.067 v1(11.075,11.78) ; v1(12.6,23.2) 12.612,23.188 13.225,23.188 U1.14
  Mid Layer 2 w0.2: v1(11.075,11.78) 12.3,13.005 12.3,20.961 12.302,20.963 12.302,22.902 v1(12.6,23.2)
MOSI_T88: P3.4 R24.1 | length 27.5
  Top Layer w0.2: v1(11.06,50.04) P3.4 ; R24.1 v1(13.4,25.8)
  Mid Layer 2 w0.2: v1(11.06,50.04) 11.06,32.24 13.4,29.9 v1(13.4,25.8)
NetC3_2: C3.2 MCP1.14 R17.2 | length 2.7
  Top Layer w0.2: R17.2 C3.2 MCP1.14@18.325,26.304 ; MCP1.14 18.379,26.35 MCP1.14@18.425,26.304
NetK2_3: K2.3 R3.1 R11.2 R12.1 | length 18.1
  Top Layer w0.3: R11.2 R12.1 ; K2.3 37.2,18.8 37.5,18.5 v2(37.5,13.2) ; R3.1 v2(37.5,11.3)
  Mid Layer 1 w0.3: v2(37.5,11.3) v2(37.5,13.2)
NetK2_6: K2.6 R4.1 R27.2 R28.1 | length 18.4
  Top Layer w0.3: R27.2 38.9,12 ; v2(38.9,13.2) 38.9,12 ; v2(38.9,14.7) 38.9,18.5 39.2,18.8 K2.6 ; R4.1 41.1,10.175 41.8,10.875 R28.1 38.9,12
  Mid Layer 1 w0.3: v2(38.9,13.2) v2(38.9,14.7)
NetK3_3: K3.3 R5.1 R12.2 R13.1 | length 18.1
  Top Layer w0.3: R12.2 45.9,13.9 ; K3.3 45.6,18.8 45.9,18.5 45.9,13.9 ; R5.1 v2(45.9,11.3) ; v2(45.9,13.2) 45.9,13.9 ; R13.1 45.9,13.9
  Mid Layer 1 w0.3: v2(45.9,11.3) v2(45.9,13.2)
NetK3_6: K3.6 R6.1 R28.2 R29.1 | length 18.4
  Top Layer w0.3: R28.2 47.3,12 ; v2(47.3,13.2) 47.3,12 ; v2(47.3,14.7) 47.3,18.5 47.6,18.8 K3.6 ; R6.1 49.5,10.175 50.2,10.875 R29.1 47.3,12
  Mid Layer 1 w0.3: v2(47.3,13.2) v2(47.3,14.7)
NetK4_3: K4.3 R7.1 R13.2 R14.1 | length 18.1
  Top Layer w0.3: R13.2 R14.1 ; K4.3 54,18.8 54.3,18.5 v2(54.3,13.2) ; R7.1 v2(54.3,11.3)
  Mid Layer 1 w0.3: v2(54.3,11.3) v2(54.3,13.2)
NetK4_6: K4.6 R8.1 R29.2 R30.1 | length 18.5
  Top Layer w0.3: R29.2 55.7,12 ; v2(55.7,13.2) 55.7,12 ; v2(55.7,14.7) 55.7,18.5 56,18.8 K4.6 ; R8.1 57.9,10.175 58.1,10.375 58.175,10.375 58.6,10.8 R30.1 55.7,12
  Mid Layer 1 w0.3: v2(55.7,13.2) v2(55.7,14.7)
NetK5_3: K5.3 R14.2 R15.1 | length 14.3
  Top Layer w0.3: R14.2 R15.1 ; K5.3 62.4,18.8 62.7,18.5 62.7,13.9
NetK5_6: K5.6 R30.2 R31.1 | length 16.2
  Top Layer w0.3: R30.2 64.1,12 ; v2(64.1,13.2) 64.1,12 ; v2(64.1,14.7) 64.1,18.5 64.4,18.8 K5.6 ; R31.1 64.1,12
  Mid Layer 1 w0.3: v2(64.1,13.2) v2(64.1,14.7)
NetK6_3: K6.3 R15.2 R16.1 | length 14.3
  Top Layer w0.3: R15.2 71.1,13.9 ; K6.3 70.8,18.8 71.1,18.5 71.1,13.9 ; R16.1 71.1,13.9
NetK6_6: K6.6 R31.2 R32.1 | length 16.2
  Top Layer w0.3: R31.2 72.3,12 R32.1@75.4,12 ; 72.5,12 v2(72.5,12.6) ; v2(72.5,14.7) 72.5,18.5 72.8,18.8 K6.6
  Mid Layer 1 w0.3: v2(72.5,12.6) v2(72.5,14.7)
NetK7_3: K7.3 R16.2 R26.1 | length 14.3
  Top Layer w0.3: R16.2 79.5,13.9 ; K7.3 79.2,18.8 79.5,18.5 79.5,13.9 ; R26.1@83.8,13.9 79.5,13.9
NetK7_6: K7.6 R32.2 R33.1 | length 16.2
  Top Layer w0.3: R32.2@76.6,12 80.7,12 R33.1@83.8,12 ; 80.9,12 v2(80.9,12.6) ; v2(80.9,14.7) 80.9,18.5 81.2,18.8 K7.6
  Mid Layer 1 w0.3: v2(80.9,12.6) v2(80.9,14.7)
NetK8_3: K8.3 R9.1 R26.2 | length 13.7
  Top Layer w0.3: R26.2@85,13.9 87,13.9 ; K8.3 87.6,18.8 87.9,18.5 87.9,14.8 87,13.9 ; v1(87.1,13.2) 87.071,13.229 87.071,13.829 87,13.9 ; v1(89.2,12) R9.1
  Mid Layer 1 w0.3: v1(87.1,13.2) 88,13.2 v1(89.2,12)
NetK8_6: K8.6 R10.1 R33.2 | length 13
  Top Layer w0.3: R33.2@85,12 87.4,12 89.3,13.9 ; R10.1 89.3,13.9 ; K8.6 89.6,18.8 89.3,18.5 89.3,13.9
NetK10_3: K10.3 R36.1 R44.2 R45.1 | length 18.4
  Top Layer w0.3: R44.2 38.9,44 ; v2(38.9,41.3) 38.9,37.5 39.2,37.2 K10.3 ; v2(38.9,42.8) 38.9,44 ; R36.1 41.1,45.825 41.8,45.125 R45.1 38.9,44
  Mid Layer 1 w0.3: v2(38.9,41.3) v2(38.9,42.8)
NetK10_6: K10.6 R37.1 R51.2 R52.1 | length 18.1
  Top Layer w0.3: R51.2 R52.1 ; K10.6 37.2,37.2 37.5,37.5 v2(37.5,42.8) ; v2(37.5,44.7) R37.1
  Mid Layer 1 w0.3: v2(37.5,42.8) v2(37.5,44.7)
NetK11_3: K11.3 R38.1 R45.2 R46.1 | length 18.4
  Top Layer w0.3: R45.2 47.3,44 ; v2(47.3,41.3) 47.3,37.5 47.6,37.2 K11.3 ; v2(47.3,42.8) 47.3,44 ; R38.1 49.5,45.825 50.2,45.125 R46.1 47.3,44
  Mid Layer 1 w0.3: v2(47.3,41.3) v2(47.3,42.8)
NetK11_6: K11.6 R39.1 R52.2 R53.1 | length 18.1
  Top Layer w0.3: R52.2 R53.1 ; K11.6 45.6,37.2 45.9,37.5 v2(45.9,42.8) ; v2(45.9,44.7) R39.1
  Mid Layer 1 w0.3: v2(45.9,42.8) v2(45.9,44.7)
NetK12_3: K12.3 R40.1 R46.2 R47.1 | length 18.4
  Top Layer w0.3: R46.2 55.7,44 ; v2(55.7,41.3) 55.7,37.5 56,37.2 K12.3 ; v2(55.7,42.8) 55.7,44 ; R40.1 57.9,45.825 58.6,45.125 R47.1 55.7,44
  Mid Layer 1 w0.3: v2(55.7,41.3) v2(55.7,42.8)
NetK12_6: K12.6 R41.1 R53.2 R54.1 | length 18.1
  Top Layer w0.3: R53.2 54.3,42.1 ; K12.6 54,37.2 54.3,37.5 54.3,42.1 ; v2(54.3,42.8) 54.3,42.1 ; v2(54.3,44.7) R41.1 ; R54.1 54.3,42.1
  Mid Layer 1 w0.3: v2(54.3,42.8) v2(54.3,44.7)
NetK13_3: K13.3 R47.2 R48.1 | length 16.2
  Top Layer w0.3: R47.2 64.1,44 ; v2(64.1,41.3) 64.1,37.5 64.4,37.2 K13.3 ; v2(64.1,42.8) 64.1,44 ; R48.1 64.1,44
  Mid Layer 1 w0.3: v2(64.1,41.3) v2(64.1,42.8)
NetK13_6: K13.6 R54.2 R55.1 | length 14.3
  Top Layer w0.3: R54.2 R55.1 ; K13.6 62.4,37.2 62.7,37.5 62.7,42.1
NetK14_3: K14.3 R48.2 R49.1 | length 16.2
  Top Layer w0.3: R48.2 72.3,44 R49.1 ; v2(72.5,41.3) 72.5,37.5 72.8,37.2 K14.3 ; v2(72.5,43.4) 72.5,44
  Mid Layer 1 w0.3: v2(72.5,41.3) v2(72.5,43.4)
NetK14_6: K14.6 R55.2 R56.1 | length 14.3
  Top Layer w0.3: R55.2 71.1,42.1 ; K14.6 70.8,37.2 71.1,37.5 71.1,42.1 ; R56.1 71.1,42.1
NetK15_3: K15.3 R49.2 R50.1 | length 16.2
  Top Layer w0.3: R49.2 80.7,44 R50.1 ; v2(80.9,41.3) 80.9,37.5 81.2,37.2 K15.3 ; v2(80.9,43.4) 80.9,44
  Mid Layer 1 w0.3: v2(80.9,41.3) v2(80.9,43.4)
NetK15_6: K15.6 R56.2 R57.1 | length 14.3
  Top Layer w0.3: R56.2 79.5,42.1 ; K15.6 79.2,37.2 79.5,37.5 79.5,42.1 ; R57.1 79.5,42.1
NetK16_3: K16.3 R42.1 R50.2 | length 13.2
  Top Layer w0.3: R50.2 87.4,44 89.3,42.1 ; R42.1 89.3,42.1 ; K16.3 89.6,37.2 89.3,37.5 89.3,42.1
NetK16_6: K16.6 R43.1 R57.2 | length 13.8
  Top Layer w0.3: R57.2 87,42.1 87.9,41.2 87.9,37.5 87.6,37.2 K16.6 ; 87.071,42.171 v1@87.071,42.771 ; v1(89.5,44) R43.1
  Mid Layer 1 w0.3: v1(87.1,42.8) 88.3,42.8 v1(89.5,44)
NetMCP1_1: MCP1.1 ULN2.2 | length 4
  Top Layer w0.2: ULN2.2 21.8,33.505 23.05,32.255 MCP1.1
NetMCP1_2: MCP1.2 ULN2.1 | length 3.9
  Top Layer w0.2: ULN2.1 21.3,33.579 22.4,32.479 MCP1.2
NetMCP1_3: MCP1.3 ULN2.20 | length 4.8
  Top Layer w0.2: ULN2.20 20.475,33.977 21.75,32.702 MCP1.3
NetMCP1_4: MCP1.4 ULN2.19 | length 5.7
  Top Layer w0.2: ULN2.19 20.175,35.8 19.848,35.473 19.848,34.057 21.1,32.805 MCP1.4
NetMCP1_17: MCP1.17 ULN1.6 | length 3.3
  Top Layer w0.2: MCP1.17 20.45,22.373 20.473,22.35 ULN1.6
NetMCP1_18: MCP1.18 ULN1.5 | length 2.5
  Top Layer w0.2: MCP1.18 21.1,23.739 21.35,23.489 ULN1.5
NetMCP1_19: MCP1.19 ULN1.4 | length 2.4
  Top Layer w0.2: MCP1.19 21.75,23.589 21.85,23.489 ULN1.4
NetMCP1_20: MCP1.20 ULN1.3 | length 2.4
  Top Layer w0.2: ULN1.3 22.35,23.489 22.4,23.539 MCP1.20
NetMCP1_21: MCP1.21 ULN1.2 | length 2.5
  Top Layer w0.2: ULN1.2 22.85,23.489 23.05,23.689 MCP1.21
NetMCP1_22: MCP1.22 ULN1.1 | length 3.5
  Top Layer w0.2: ULN1.1 23.35,23.489 23.575,23.714 23.575,26.304 23.621,26.35 MCP1.22
NetMCP1_23: MCP1.23 ULN1.20 | length 5.3
  Top Layer w0.2: MCP1.23 24.175,27 24.527,26.648 24.527,24.673 24.175,24.321 ULN1.20
NetMCP1_24: MCP1.24 ULN1.19 | length 6.9
  Top Layer w0.2: MCP1.24 24.175,27.65 24.828,26.997 24.828,22.203 24.475,21.85 ULN1.19
NetMCP1_25: MCP1.25 ULN2.6 | length 8.3
  Top Layer w0.2: MCP1.25 24.175,28.3 25.303,29.428 25.303,31.875 24.125,33.053 ULN2.6
NetMCP1_26: MCP1.26 ULN2.5 | length 6.9
  Top Layer w0.2: ULN2.5 23.3,33.285 25.002,31.583 25.002,29.777 24.175,28.95 MCP1.26
NetMCP1_27: MCP1.27 ULN2.4 | length 6.2
  Top Layer w0.2: ULN2.4 22.8,33.358 24.7,31.458 24.7,30.117 24.183,29.6 MCP1.27
NetMCP1_28: MCP1.28 ULN2.3 | length 5
  Top Layer w0.2: ULN2.3 22.3,33.432 23.575,32.157 23.575,30.296 23.621,30.25 MCP1.28
NetR18_2: R18.2 U1.6 | length 1.2
  Top Layer w0.2: U1.6 17.71,22.05 R18.2@17.76,22.1
NetR23_2: R23.2 U1.12 | length 1.2
  Top Layer w0.2: U1.12 14.125,23.45 14.26,23.585 R23.2@14.26,24.3
NetR24_2: R24.2 U1.13 | length 1.2
  Top Layer w0.2: R24.2@13.5,24.3 13.5,23.625 13.675,23.45 U1.13
NetR25_2: R25.2 U1.15 | length 2.4
  Top Layer w0.2: R25.2 11.9,22.5 U1.15
R11: K1.8 ULN1.17 | length 12.4
  Top Layer w0.2: ULN1.17 24.85,20.85 v1(24.856,20.844) ; v1(31.7,24.2) K1.8
  Mid Layer 2 w0.2: v1(24.856,20.844) 24.856,24.09 25.455,24.689 31.211,24.689 v1(31.7,24.2)
R12: K2.8 ULN1.16 | length 23.3
  Top Layer w0.2: v1(24.1,19.7) 24.1,20.277 24.173,20.35 ULN1.16 ; v1(40.1,24.2) K2.8
  Mid Layer 2 w0.2: v1(24.1,19.7) 24.1,24.59 24.5,24.99 39.31,24.99 v1(40.1,24.2)
R13: K3.8 ULN1.15 | length 34.3
  Top Layer w0.2: v1(23.35,18.75) ULN1.15 ; K3.8 v1(49.7,25)
  Mid Layer 2 w0.2: v1(23.35,18.75) 23.35,20.149 23.702,20.5 23.702,25.069 23.925,25.292 49.408,25.292 v1(49.7,25)
R14: K4.8 ULN1.14 | length 44.2
  Top Layer w0.2: v1(22.85,18.35) ULN1.14 ; K4.8 v1(58.1,25)
  Mid Layer 2 w0.2: v1(22.85,18.35) 22.85,20.075 23.4,20.625 23.4,25.194 23.8,25.594 57.506,25.594 v1(58.1,25)
R15: K5.8 ULN1.13 | length 52.5
  Top Layer w0.2: v1(22.35,18.75) ULN1.13 ; K5.8 v1(66.5,25)
  Mid Layer 2 w0.2: v1(22.35,18.75) 22.35,24.57 23.675,25.895 65.605,25.895 v1(66.5,25)
R16: K6.8 ULN1.12 | length 62.9
  Top Layer w0.2: v1(21.85,18.35) ULN1.12 ; K6.8 v1(74.9,25)
  Mid Layer 2 w0.2: v1@21.898,18.302 v1(21.85,18.35) 21.85,18.952 21.302,19.5 21.302,23.949 23.55,26.197 73.703,26.197 v1(74.9,25)
R17: K7.8 ULN1.11 | length 71.1
  Top Layer w0.2: v1(21.35,18.75) ULN1.11 ; K7.8 83.3,24.3 83.2,24.4 83.25,24.4 83.3,24.45 v1(83.3,25)
  Mid Layer 2 w0.2: v1(21.35,18.75) 21,19.1 21,24.073 23.425,26.498 81.802,26.498 v1(83.3,25)
R18: K8.8 ULN1.10 | length 79.8
  Top Layer w0.2: v1(20.45,19.45) 20.45,20.327 20.473,20.35 ULN1.10 ; K8.8 v1(91.7,25)
  Mid Layer 2 w0.2: v1(20.45,19.45) 20.45,23.95 23.3,26.8 90.6,26.8 91.7,25.7 v1(91.7,25)
R21: K9.8 ULN2.10 | length 11.3
  Top Layer w0.2: ULN2.10@24.2,37.323 v1(24.2,38.2) ; K9.8 v1(28,31.8)
  Mid Layer 2 w0.2: v1(24.2,38.2) 24.231,38.169 24.231,33.654 26.086,31.8 v1(28,31.8)
R22: K10.8 ULN2.11 | length 21.4
  Top Layer w0.2: ULN2.11 v1(23.3,38.9) ; K10.8 v1(36.4,31.8)
  Mid Layer 2 w0.2: v1(23.3,38.9) 23.3,37.896 23.93,37.266 23.93,36.33 23.93,33.53 26.28,31.18 35.78,31.18 v1(36.4,31.8)
R23: K11.8 ULN2.12 | length 29.3
  Top Layer w0.2: ULN2.12 v1(22.8,39.3) ; v1(43.5,31) K11.8
  Mid Layer 2 w0.2: v1(22.8,39.3) 22.8,37.8 23.6,37 23.6,33.433 24.166,32.866 26.325,30.708 43.208,30.708 v1(43.5,31)
R24: K12.8 ULN2.13 | length 37.6
  Top Layer w0.2: ULN2.13 v1(22.3,38.9) ; v1(51.9,31) K12.8
  Mid Layer 2 w0.2: v1(22.3,38.9) 22.3,34.306 26.2,30.406 51.306,30.406 v1(51.9,31)
R25: K13.8 ULN2.14 | length 48
  Top Layer w0.2: ULN2.14 v1(21.8,39.3) ; v1(60.3,31) K13.8
  Mid Layer 2 w0.2: v1(21.8,39.3) 21.8,38.5 21.2,37.9 21.2,34.98 26.075,30.105 59.405,30.105 v1(60.3,31)
R26: K14.8 ULN2.15 | length 56.3
  Top Layer w0.2: ULN2.15 v1(21.3,38.9) ; v1(68.7,31) K14.8
  Mid Layer 2 w0.2: v1(21.3,38.9) 20.802,38.402 20.802,34.951 25.95,29.803 67.503,29.803 v1(68.7,31)
R27: K15.8 ULN2.16 | length 64.2
  Top Layer w0.2: v1(20.3,38) 20.3,37.523 ULN2.16@20.5,37.323 ; v1(77.1,31) K15.8
  Mid Layer 2 w0.2: v1(20.3,38) 20.3,35.027 25.825,29.502 75.602,29.502 v1(77.1,31)
R28: K16.8 ULN2.17 | length 72.2
  Top Layer w0.2: v1(19.7,36.8) ULN2.17 ; v1(85.5,31) K16.8
  Mid Layer 2 w0.2: v1(19.7,36.8) 19.7,35.2 25.7,29.2 83.7,29.2 v1(85.5,31)
R\E\S\E\T\: P3.10 P4.10 R19.2 U1.25 | length 47.6
  Top Layer w0.2: R19.2 v1(15,32.1) ; U1.25 14.575,18.625 15,18.2 v1(16.1,18.2) ; P4.10 v1(14.87,10.17) ; P3.10 14.9,51.67 v1(14.9,50)
  Mid Layer 2 w0.2: v1(14.87,10.17) 14.87,11.024 16.1,12.254 v1(16.1,18.2) 16.1,25.3 15.6,25.8 15.6,32.1 ; v1@14.948,49.952 v1(14.9,50) 14.9,36 15.6,35.3 15.6,32.1 ; v1(15,32.1) 15.6,32.1
S\S\: P3.8 P4.8 R23.1 | length 44.6
  Top Layer w0.2: P4.8 v1(13.6,10.18) ; v1(13.6,50) P3.8 ; R23.1 14.309,25.149 v1(14.309,25.791)
  Mid Layer 2 w0.2: v1(13.6,10.18) 13.6,11.5 14.618,12.518 14.618,21.981 14.7,22.063 14.7,25.333 v1@14.309,25.723 ; v1(13.6,50) 13.6,31 14.309,30.291 v1(14.309,25.791)
SCK: P3.6 P4.6 R25.1 | length 47.6
  Top Layer w0.2: R25.1 11.9,25.179 v1(12.6,25.179) ; v1(12.3,50) 12.3,51.67 P3.6 ; P4.6 v1(12.33,10.184)
  Mid Layer 2 w0.2: v1(12.3,50) 12.276,50.024 11.775,50.024 11.307,50.492 10.873,50.492 10.4,50.019 10.4,31.9 12.6,29.7 v1(12.6,25.179) 13.052,24.727 13.052,19.652 12.8,19.4 12.8,12.4 12.33,11.93 v1(12.33,10.184)
SCL: MCP1.8 R22.2 U1.24 | length 18.6
  Top Layer w0.2: v1(14.1,17.4) 14.125,17.425 U1.24 ; v1(17.525,30.9) 17.525,30.832 17.406,30.714 17.406,30.341 R22.2 17.948,30.2 17.998,30.25 MCP1.8
  Bottom Layer w0.2: v1(14.1,17.4) 14.1,19.29 14.6,19.79 14.6,22.3 16.939,24.639 16.939,30.314 v1(17.525,30.9)
SDA: MCP1.9 R21.2 U1.23 | length 15.5
  Top Layer w0.2: v1(13.4,18) 13.675,18.275 U1.23 ; v1(16.3,28.6) 16.348,28.648 16.533,28.648 R21.2@17.265,29.38 ; R21.2 R21.2@17.265,29.38 ; MCP1.9 18.045,29.6 17.825,29.38 R21.2@17.265,29.38
  Bottom Layer w0.2: v1(13.4,18) 13.4,22.1 16.3,25 v1(16.3,28.6)
pads on no net: K5.2 K5.7 K6.2 K6.7 K7.2 K7.7 K8.2 K8.7 K13.2 K13.7 K14.2 K14.7 K15.2 K15.7 K16.2 K16.7 LD1.4 MCP1.7 MCP1.10 MCP1.15 MCP1.16 U1.1 U1.2 U1.5 U1.7 U1.8 U1.9 U1.10 U1.11 U1.17 U1.19 U1.20 U1.21 U1.22 U1.26 U1.27 U1.28 ULN1.7 ULN1.18 ULN2.7 ULN2.18
copper on no net:
  other v5: 3.2,3 78.2,3 3.2,53 78.2,53

## Polygon pours and split planes (outlines as drawn)
no net on Top Overlay "NONET_L-01_P-001" (solid, remove dead copper): 26,28
no net on Top Overlay "NONET_L-01_P-001" (solid): 11.8,3 11.8,2.2 14,2.2 14,3
no net on Top Overlay "NONET_L-01_P-001" (solid): 11.7,44.2 11.7,43.4 13.9,43.4 13.9,44.2
GND on Top Layer "NONET_L-01_P-001" (solid, remove dead copper, pour order 22): 0,58.5 0,-2.5 23.8,-2.5 23.8,14.3 26,14.3 26,42.6 23.8,42.6 23.8,58.5
AGND1 on Top Layer "NONET_L-01_P-001" (solid, remove dead copper, pour order 15): 100,-2.5 23.8,-2.5 23.8,14.3 26,14.3 26,27.8 100,27.8
AGND2 on Top Layer "NONET_L-01_P-001" (solid, remove dead copper, pour order 14): 100,58.5 23.8,58.5 23.8,42.6 26,42.6 26,28.2 100,28.2
+3.3V on Mid Layer 1 "NONET_L-01_P-001" (solid, remove dead copper, pour order 23): 0,58.5 0,-2.5 23.8,-2.5 23.8,14.3 26,14.3 26,42.6 23.8,42.6 23.8,58.5
AGND2 on Mid Layer 1 "NONET_L-01_P-001" (solid, remove dead copper, pour order 19): 100,58.5 23.8,58.5 23.8,42.6 26,42.6 26,28.2 100,28.2
AGND1 on Mid Layer 1 "NONET_L-01_P-001" (solid, remove dead copper, pour order 16): 100,-2.5 23.8,-2.5 23.8,14.3 26,14.3 26,27.8 100,27.8
GND on Mid Layer 2 "NONET_L-01_P-001" (solid, remove dead copper, pour order 24): 0,58.5 0,-2.5 23.8,-2.5 23.8,14.3 26,14.3 26,42.6 23.8,42.6 23.8,58.5
AGND2 on Mid Layer 2 "NONET_L-01_P-001" (solid, remove dead copper, pour order 20): 100,58.5 23.8,58.5 23.8,42.6 26,42.6 26,28.2 100,28.2
AGND1 on Mid Layer 2 "NONET_L-01_P-001" (solid, remove dead copper, pour order 17): 100,-2.5 23.8,-2.5 23.8,14.3 26,14.3 26,27.8 100,27.8
GND on Bottom Layer "NONET_L-01_P-001" (solid, remove dead copper, pour order 25): 0,58.5 0,-2.5 23.8,-2.5 23.8,14.3 26,14.3 26,42.6 23.8,42.6 23.8,58.5
AGND2 on Bottom Layer "NONET_L-01_P-001" (solid, remove dead copper, pour order 21): 100,58.5 23.8,58.5 23.8,42.6 26,42.6 26,28.2 100,28.2
AGND1 on Bottom Layer "NONET_L-01_P-001" (solid, remove dead copper, pour order 18): 100,-2.5 23.8,-2.5 23.8,14.3 26,14.3 26,27.8 100,27.8

## Other copper
Top Layer:
  text "By: / ElShiny" at 16.834,-1.9 h1

## Silkscreen, mask and mechanical layers (free items; w line width, h text height)
Top Overlay:
  lines w0.2: 0.9,9.3 0.3,9.3 ; 8.7,46 17,46 ; 8.8,3 17.1,3 ; 12.05,19.1 12.05,18.6 12.55,18.6 ; 12.05,23.2 12.05,23.7 12.55,23.7 ; 16.65,23.7 17.15,23.7 17.15,23.2 ; 0.3,9.3 0.3,20.5 0.3,23.8 2.8,23.8 2.8,22.3 2.8,9.3 0.3,9.3
  text "V1.0" at 2.2,46.3 h1 r90
  text "DATA IN" at 19.7,45.8 h1 r90
  text "G +5 +12 G" at 4.494,35.803 h1 r90
  text "G +5 +12 G" at 4.494,25.303 h1 r90
  text "2023" at 6.8,14.2 h1 r90
  text "UNIREL-SW MINI" at 2.3,9.9 h1 r90
  text "(c) Distopik Ltd." at 5,8.7 h1 r90
  text "DATA OUT" at 19.2,2.9 h1 r90
Mechanical 1:
  the board outline again, w0.2

## Text inside footprints (layer, text, board x,y; h text height)
C10: Top Overlay "+" at 8.6,39.7 h1.5 r90
C11: Top Overlay "+" at 7.2,27.2 h1.5 r270
P5: Top Overlay "2" at 24.26,2.532 h1.27; Top Overlay "1" at 24.26,-0.008 h1.27
P7: Top Overlay "1" at 24.16,52.452 h1.27; Top Overlay "2" at 24.16,54.992 h1.27